# EAGLE board Base_Block-Panel-v10 (EAGLE 6.6.0), part 1 of 4
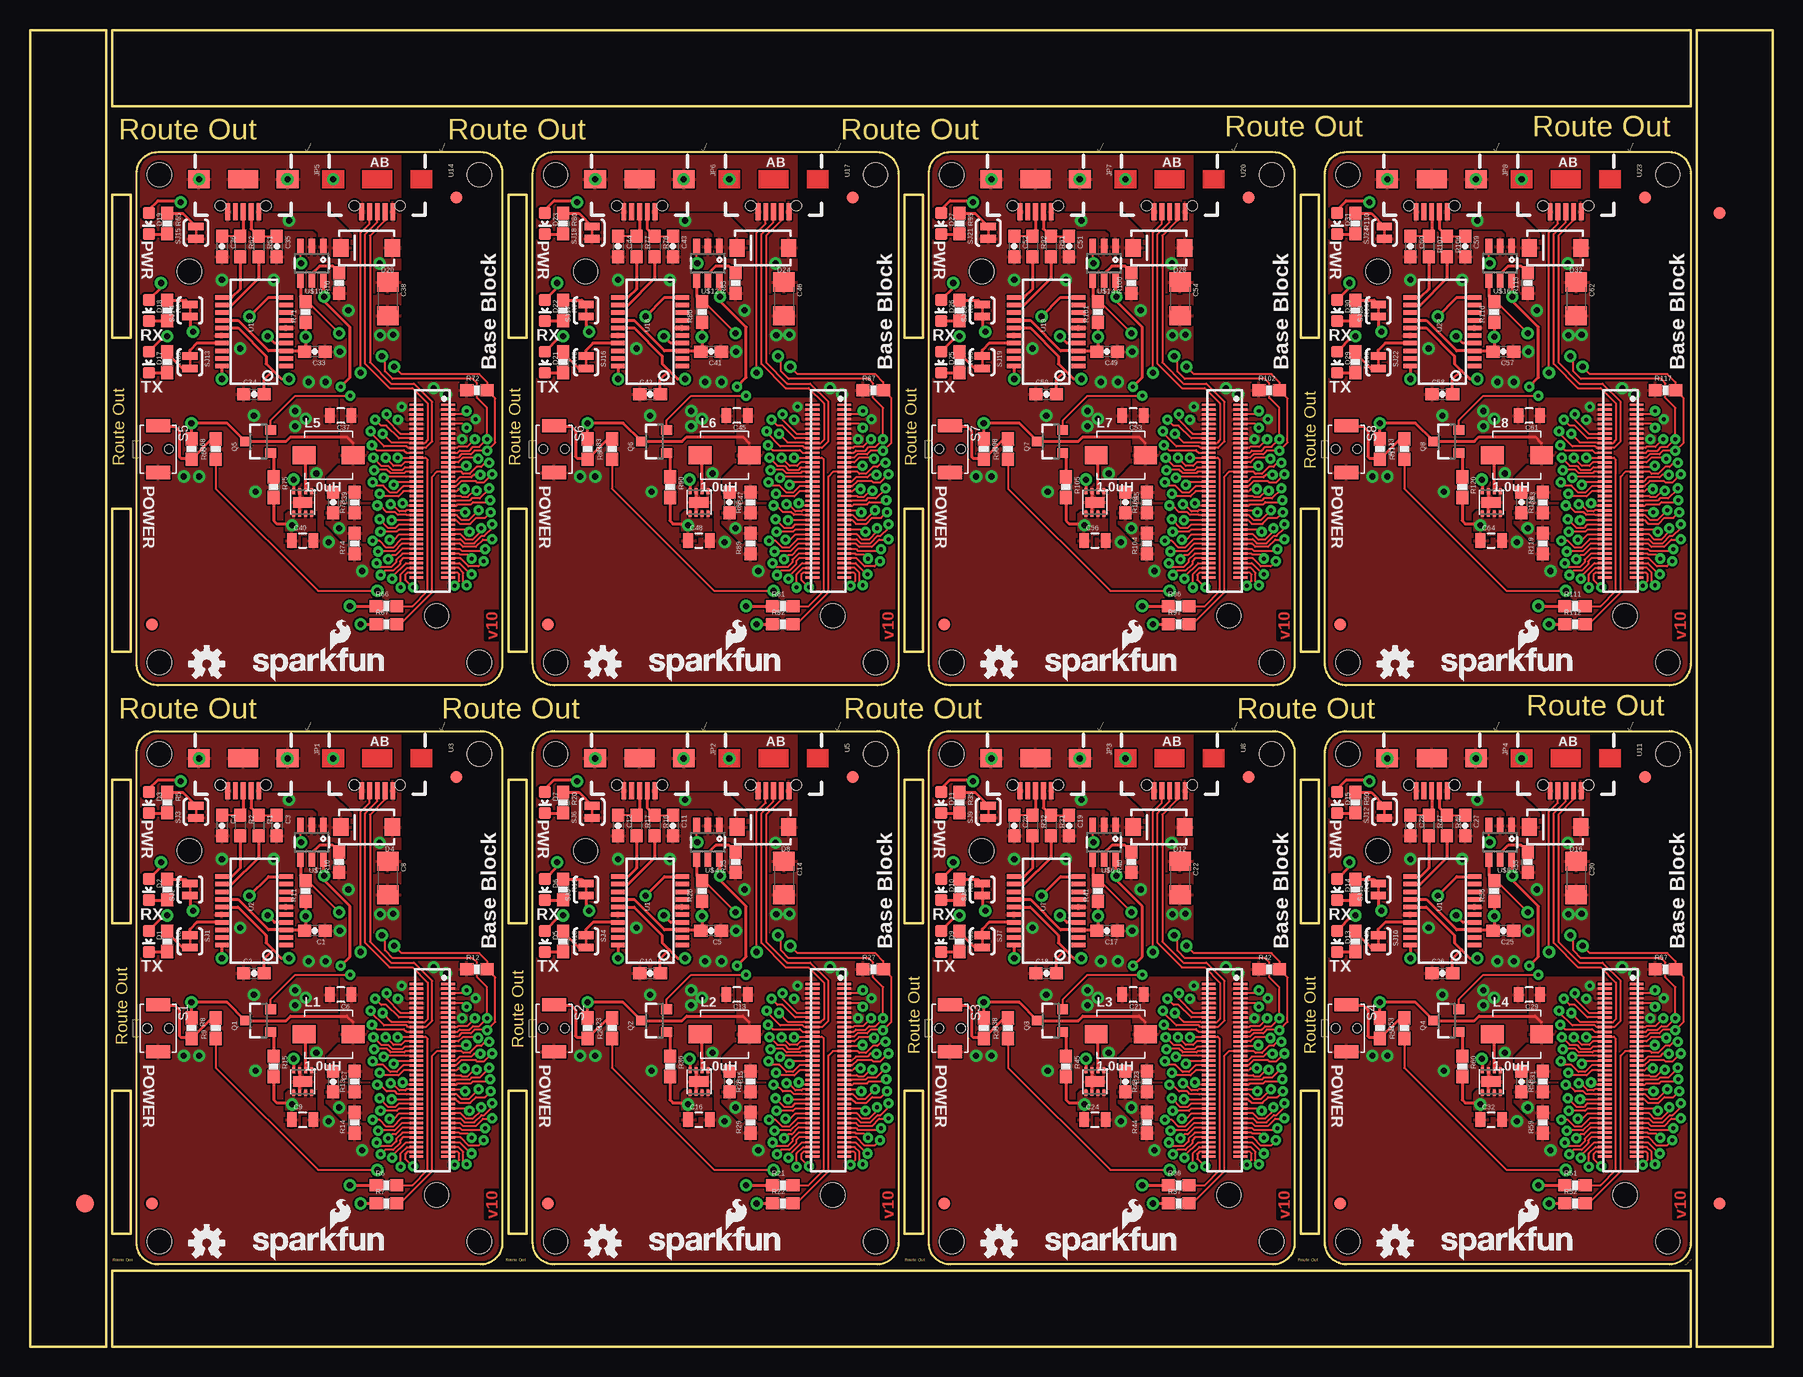
[diagram p0: board, top side]
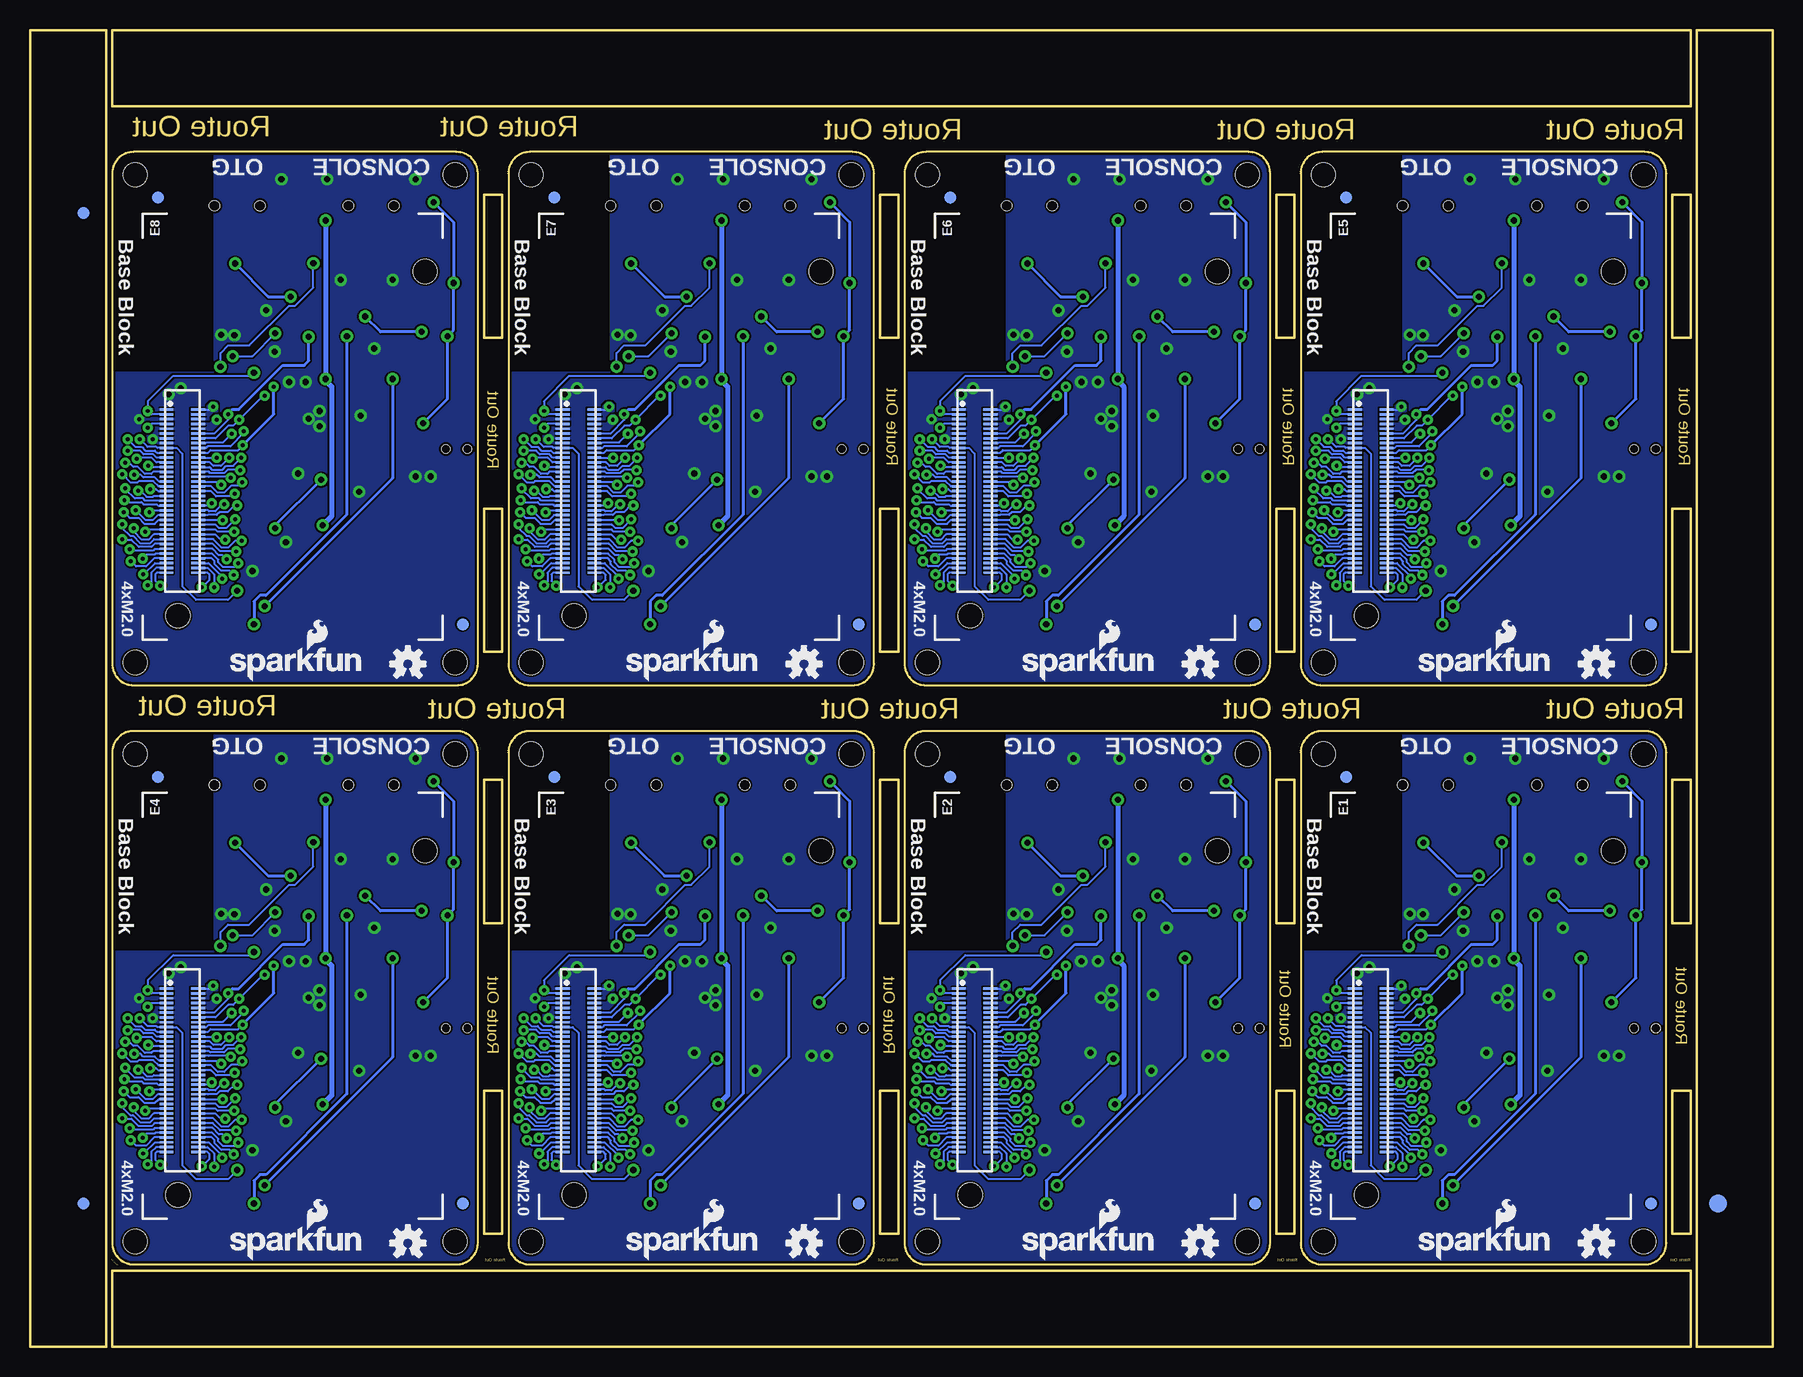
[diagram p1: board, bottom side, seen from below]

Size 145.29 x 109.73 mm. Coordinates in mm from the lower left corner, seen from the top.
Outline: 6.35,79.25 6.35,0 0,0 0,29.72
Outline: 145.29,79.25 145.29,0 138.94,0 138.94,29.72
Outline: 138.94,27.18 138.94,109.73 145.29,109.73 145.29,76.71
Outline: 0,27.18 0,109.73 6.35,109.73 6.35,76.71
Outline: 39.37,49.53 39.37,8.64 arc-90 37.59,6.86 10.67,6.86 arc-90 8.89,8.64 8.89,49.53 arc-90 10.67,51.31 37.59,51.31 arc-90 39.37,49.53
Outline: 72.39,49.53 72.39,8.64 arc-90 70.61,6.86 43.69,6.86 arc-90 41.91,8.64 41.91,49.53 arc-90 43.69,51.31 70.61,51.31 arc-90 72.39,49.53
Outline: 105.41,49.53 105.41,8.64 arc-90 103.63,6.86 76.71,6.86 arc-90 74.93,8.64 74.93,49.53 arc-90 76.71,51.31 103.63,51.31 arc-90 105.41,49.53
Outline: 138.43,49.53 138.43,8.64 arc-90 136.65,6.86 109.73,6.86 arc-90 107.95,8.64 107.95,49.53 arc-90 109.73,51.31 136.65,51.31 arc-90 138.43,49.53
Outline: 39.37,97.79 39.37,56.9 arc-90 37.59,55.12 10.67,55.12 arc-90 8.89,56.9 8.89,97.79 arc-90 10.67,99.57 37.59,99.57 arc-90 39.37,97.79
Outline: 72.39,97.79 72.39,56.9 arc-90 70.61,55.12 43.69,55.12 arc-90 41.91,56.9 41.91,97.79 arc-90 43.69,99.57 70.61,99.57 arc-90 72.39,97.79
Outline: 105.41,97.79 105.41,56.9 arc-90 103.63,55.12 76.71,55.12 arc-90 74.93,56.9 74.93,97.79 arc-90 76.71,99.57 103.63,99.57 arc-90 105.41,97.79
Outline: 138.43,97.79 138.43,56.9 arc-90 136.65,55.12 109.73,55.12 arc-90 107.95,56.9 107.95,97.79 arc-90 109.73,99.57 136.65,99.57 arc-90 138.43,97.79
Outline: 6.86,0 138.43,0 138.43,6.35 6.86,6.35 6.86,0
Outline: 6.86,103.38 138.43,103.38 138.43,109.73 6.86,109.73 6.86,103.38
Outline: 8.38,9.4 8.38,21.34 6.86,21.34 6.86,9.4 8.38,9.4
Outline: 41.4,9.4 41.4,21.34 39.88,21.34 39.88,9.4 41.4,9.4
Outline: 74.42,9.4 74.42,21.34 72.9,21.34 72.9,9.4 74.42,9.4
Outline: 107.44,9.4 107.44,21.34 105.92,21.34 105.92,9.4 107.44,9.4
Outline: 105.92,47.24 105.92,35.31 107.44,35.31 107.44,47.24 105.92,47.24
Outline: 72.9,47.24 72.9,35.31 74.42,35.31 74.42,47.24 72.9,47.24
Outline: 39.88,47.24 39.88,35.31 41.4,35.31 41.4,47.24 39.88,47.24
Outline: 6.86,47.24 6.86,35.31 8.38,35.31 8.38,47.24 6.86,47.24
Outline: 8.38,57.91 8.38,69.85 6.86,69.85 6.86,57.91 8.38,57.91
Outline: 41.4,57.91 41.4,69.85 39.88,69.85 39.88,57.91 41.4,57.91
Outline: 74.42,57.91 74.42,69.85 72.9,69.85 72.9,57.91 74.42,57.91
Outline: 107.44,57.91 107.44,69.85 105.92,69.85 105.92,57.91 107.44,57.91
Outline: 105.92,96.01 105.92,84.07 107.44,84.07 107.44,96.01 105.92,96.01
Outline: 72.9,96.01 72.9,84.07 74.42,84.07 74.42,96.01 72.9,96.01
Outline: 39.88,96.01 39.88,84.07 41.4,84.07 41.4,96.01 39.88,96.01
Outline: 6.86,96.01 6.86,84.07 8.38,84.07 8.38,96.01 6.86,96.01
Copper layers (1*16): Top 0.035mm / dielectric 1.5mm / Bottom 0.035mm
Design rules "SparkFun-2-layer *": minimum track width 6mil, minimum drill 13mil, track to track 6mil, track to pad 6mil, pad to pad 6mil, via to via 6mil, smd to smd 6mil, copper to edge 8mil, drill to drill 8mil, minimum pad ring 12mil, minimum via ring 10mil, stop-mask expansion 4mil, vias tented up to drill 20mil, thermal gap 6mil
Holes 2 mm at 37.47,8.76 10.79,8.76 10.79,49.4 37.47,49.4 70.48,8.76 43.81,8.76 43.81,49.4 70.48,49.4 103.5,8.76 76.83,8.76 76.83,49.4 103.5,49.4 136.53,8.76 109.86,8.76 109.86,49.4 136.53,49.4 37.47,57.02 10.79,57.02 10.79,97.66 37.47,97.66 70.48,57.02 43.81,57.02 43.81,97.66 70.48,97.66 103.5,57.02 76.83,57.02 76.83,97.66 103.5,97.66 136.53,57.02 109.86,57.02 109.86,97.66 136.53,97.66
tRestrict: area 31,33 to 39.4,51.3; area 64,33 to 72.4,51.3; area 97,33 to 105.4,51.3; area 130,33 to 138.4,51.3; area 31,81.3 to 39.4,99.6; area 64,81.3 to 72.4,99.6; area 97,81.3 to 105.4,99.6; area 130,81.3 to 138.4,99.6; 16 lines
bRestrict: area 31,33 to 39.4,51.3; area 64,33 to 72.4,51.3; area 97,33 to 105.4,51.3; area 130,33 to 138.4,51.3; area 31,81.3 to 39.4,99.6; area 64,81.3 to 72.4,99.6; area 97,81.3 to 105.4,99.6; area 130,81.3 to 138.4,99.6

## Footprints (pad centres in the part's own frame; a part is rotated, then mirrored left to right if it is on the bottom)
0603-CAP = smd 1.1 x 1: 1 -0.85,0; 2 0.85,0
0805 = smd 0.8 x 1.2: 1 -0.9,0; 2 0.9,0
1206 = smd 1.6 x 1.8: 1 -1.4,0; 2 1.4,0
LED-0603 = smd 1 x 1: A 0,-0.877; C 0,0.877
SMA-DIODE = smd 1.27 x 1.47: A -2.15,0; C 2.15,0
EDISON_DAUGHTER = smd 1.14 x 0.2: 1 1.98,19.17; 2 4.62,19.17; 3 1.98,18.77; 4 4.62,18.77; 5 1.98,18.37; 6 4.62,18.37; 7 1.98,17.97; 8 4.62,17.97; 9 1.98,17.57; 10 4.62,17.57; 11 1.98,17.17; 12 4.62,17.17; 13 1.98,16.77; 14 4.62,16.77; 15 1.98,16.37; 16 4.62,16.37; 17 1.98,15.97; 18 4.62,15.97; 19 1.98,15.57; 20 4.62,15.57; 21 1.98,15.17; 22 4.62,15.17; 23 1.98,14.77; 24 4.62,14.77; 25 1.98,14.37; 26 4.62,14.37; 27 1.98,13.97; 28 4.62,13.97; 29 1.98,13.57; 30 4.62,13.57; 31 1.98,13.17; 32 4.62,13.17; 33 1.98,12.77; 34 4.62,12.77; 35 1.98,12.37; 36 4.62,12.37; 37 1.98,11.97; 38 4.62,11.97; 39 1.98,11.57; 40 4.62,11.57; 41 1.98,11.17; 42 4.62,11.17; 43 1.98,10.77; 44 4.62,10.77; 45 1.98,10.37; 46 4.62,10.37; 47 1.98,9.97; 48 4.62,9.97; 49 1.98,9.57; 50 4.62,9.57; 51 1.98,9.17; 52 4.62,9.17; 53 1.98,8.77; 54 4.62,8.77; 55 1.98,8.37; 56 4.62,8.37; 57 1.98,7.97; 58 4.62,7.97; 59 1.98,7.57; 60 4.62,7.57; 61 1.98,7.17; 62 4.62,7.17; 63 1.98,6.77; 64 4.62,6.77; 65 1.98,6.37; 66 4.62,6.37; 67 1.98,5.97; 68 4.62,5.97; 69 1.98,5.57; 70 4.62,5.57 | hole 2: 23.53,30.67; 2.93,1.98
FIDUCIAL-1.5X3 = smd 1.5 x 1.5: 1 0,0
FIDUCIAL-1X2 = smd 1 x 1: 1 0,0
USB-B-MICRO-SMD_V03 = smd 1.4 x 0.4: D+1 2.7,0; D-1 2.7,0.65; GND1 2.7,-1.3; ID1 2.7,-0.65; VBUS1 2.7,1.3 | smd 1.5 x 1.8: SHIELD1 0,3.7; SHIELD2 0,-3.7 | smd 1.5 x 2.5: SHIELD3 0,0 | hole 0.85: 2.2,1.9; 2.2,-1.9
INDUCTOR-SRP4020 = smd 1.9 x 1.5: P$1 -2.05,0; P$2 2.05,0
SOT23-3 = smd 0.8 x 0.9: 1 -0.95,-1; 2 0.95,-1; 3 0,1.1
0603 = smd 1.1 x 1: 1 -0.85,0; 2 0.85,0
0603-RES = smd 1.1 x 1: 1 -0.85,0; 2 0.85,0
TACTILE_SWITCH-SMD-RIGHT-ANGLE = smd 1.1 x 2: 1 -1.95,0; 2 1.95,0 | hole 0.7: 0,0.9; 0,-0.9
PAD-JUMPER-2-NC_BY_TRACE_YES_SILK = smd 0.635 x 1.27: 1 -0.508,0; 2 0.508,0
SSOP20_L = smd 0.381 x 1.143: 1 -2.857,-2.68; 2 -2.223,-2.68; 3 -1.587,-2.68; 4 -0.953,-2.68; 5 -0.318,-2.68; 6 0.318,-2.68; 7 0.953,-2.68; 8 1.587,-2.68; 9 2.223,-2.68; 10 2.857,-2.68; 11 2.857,2.68; 12 2.223,2.68; 13 1.587,2.68; 14 0.953,2.68; 15 0.318,2.68; 16 -0.318,2.68; 17 -0.953,2.68; 18 -1.587,2.68; 19 -2.223,2.68; 20 -2.857,2.68
USB-AB-MICRO-SMD_V03 = smd 1.4 x 0.4: D+1 2.7,0; D-1 2.7,0.65; GND1 2.7,-1.3; ID1 2.7,-0.65; VBUS1 2.7,1.3 | hole 0.85: 2.2,1.9; 2.2,-1.9
WSON-8-PAD = smd 0.25 x 0.5: 1 -0.75,-0.95; 2 -0.25,-0.95; 3 0.25,-0.95; 4 0.75,-0.95; 5 0.75,0.95; 6 0.25,0.95; 7 -0.25,0.95; 8 -0.75,0.95 | smd 1.6 x 0.9: PAD 0,0
SOT23-6 = smd 0.55 x 1.35: 1 -0.95,-1.375; 2 0,-1.375; 3 0.95,-1.375; 4 0.95,1.375; 5 0,1.375; 6 -0.95,1.375
DF40C-70DP-0.4(51) = smd 0.2 x 1.14 bottom: 1 6.8,1.32; 2 6.8,-1.32; 3 6.4,1.32; 4 6.4,-1.32; 5 6,1.32; 6 6,-1.32; 7 5.6,1.32; 8 5.6,-1.32; 9 5.2,1.32; 10 5.2,-1.32; 11 4.8,1.32; 12 4.8,-1.32; 13 4.4,1.32; 14 4.4,-1.32; 15 4,1.32; 16 4,-1.32; 17 3.6,1.32; 18 3.6,-1.32; 19 3.2,1.32; 20 3.2,-1.32; 21 2.8,1.32; 22 2.8,-1.32; 23 2.4,1.32; 24 2.4,-1.32; 25 2,1.32; 26 2,-1.32; 27 1.6,1.32; 28 1.6,-1.32; 29 1.2,1.32; 30 1.2,-1.32; 31 0.8,1.32; 32 0.8,-1.32; 33 0.4,1.32; 34 0.4,-1.32; 35 0,1.32; 36 0,-1.32; 37 -0.4,1.32; 38 -0.4,-1.32; 39 -0.8,1.32; 40 -0.8,-1.32; 41 -1.2,1.32; 42 -1.2,-1.32; 43 -1.6,1.32; 44 -1.6,-1.32; 45 -2,1.32; 46 -2,-1.32; 47 -2.4,1.32; 48 -2.4,-1.32; 49 -2.8,1.32; 50 -2.8,-1.32; 51 -3.2,1.32; 52 -3.2,-1.32; 53 -3.6,1.32; 54 -3.6,-1.32; 55 -4,1.32; 56 -4,-1.32; 57 -4.4,1.32; 58 -4.4,-1.32; 59 -4.8,1.32; 60 -4.8,-1.32; 61 -5.2,1.32; 62 -5.2,-1.32; 63 -5.6,1.32; 64 -5.6,-1.32; 65 -6,1.32; 66 -6,-1.32; 67 -6.4,1.32; 68 -6.4,-1.32; 69 -6.8,1.32; 70 -6.8,-1.32; NC1 7.2,1.32; NC2 7.2,-1.32; NC3 -7.2,-1.32; NC4 -7.2,1.32

## Placement (x,y rotation side)
C1  0.1uF  [0603-CAP]  23.75,34.67 180 top
C2  0.1uF  [0603-CAP]  18.67,31.11 0 top
C3  47pF  [0603-CAP]  20.57,43.43 270 top
C4  47pF  [0603-CAP]  16,43.43 270 top
C5  0.1uF  [0603-CAP]  56.77,34.67 180 top
C6  22uF  [0805]  25.91,29.34 180 top
C7  47pF  [0603-CAP]  25.27,22.1 270 top
C8  10uF  [1206]  29.82,39.07 270 top
C9  22uF  [0805]  22.73,18.92 0 top
C10  0.1uF  [0603-CAP]  51.69,31.11 0 top
C11  47pF  [0603-CAP]  53.59,43.43 270 top
C12  47pF  [0603-CAP]  49.02,43.43 270 top
C13  22uF  [0805]  58.93,29.34 180 top
C14  10uF  [1206]  62.84,39.07 270 top
C15  47pF  [0603-CAP]  58.29,22.1 270 top
C16  22uF  [0805]  55.75,18.92 0 top
C17  0.1uF  [0603-CAP]  89.79,34.67 180 top
C18  0.1uF  [0603-CAP]  84.71,31.11 0 top
C19  47pF  [0603-CAP]  86.61,43.43 270 top
C20  47pF  [0603-CAP]  82.04,43.43 270 top
C21  22uF  [0805]  91.95,29.34 180 top
C22  10uF  [1206]  95.86,39.07 270 top
C23  47pF  [0603-CAP]  91.31,22.1 270 top
C24  22uF  [0805]  88.77,18.92 0 top
C25  0.1uF  [0603-CAP]  122.81,34.67 180 top
C26  0.1uF  [0603-CAP]  117.73,31.11 0 top
C27  47pF  [0603-CAP]  119.63,43.43 270 top
C28  47pF  [0603-CAP]  115.06,43.43 270 top
C29  22uF  [0805]  124.97,29.34 180 top
C30  10uF  [1206]  128.88,39.07 270 top
C31  47pF  [0603-CAP]  124.33,22.1 270 top
C32  22uF  [0805]  121.79,18.92 0 top
C33  0.1uF  [0603-CAP]  23.75,82.93 180 top
C34  0.1uF  [0603-CAP]  18.67,79.38 0 top
C35  47pF  [0603-CAP]  20.57,91.69 270 top
C36  47pF  [0603-CAP]  16,91.69 270 top
C37  22uF  [0805]  25.91,77.6 180 top
C38  10uF  [1206]  29.82,87.33 270 top
C39  47pF  [0603-CAP]  25.27,70.36 270 top
C40  22uF  [0805]  22.73,67.18 0 top
C41  0.1uF  [0603-CAP]  56.77,82.93 180 top
C42  0.1uF  [0603-CAP]  51.69,79.38 0 top
C43  47pF  [0603-CAP]  53.59,91.69 270 top
C44  47pF  [0603-CAP]  49.02,91.69 270 top
C45  22uF  [0805]  58.93,77.6 180 top
C46  10uF  [1206]  62.84,87.33 270 top
C47  47pF  [0603-CAP]  58.29,70.36 270 top
C48  22uF  [0805]  55.75,67.18 0 top
C49  0.1uF  [0603-CAP]  89.79,82.93 180 top
C50  0.1uF  [0603-CAP]  84.71,79.38 0 top
C51  47pF  [0603-CAP]  86.61,91.69 270 top
C52  47pF  [0603-CAP]  82.04,91.69 270 top
C53  22uF  [0805]  91.95,77.6 180 top
C54  10uF  [1206]  95.86,87.33 270 top
C55  47pF  [0603-CAP]  91.31,70.36 270 top
C56  22uF  [0805]  88.77,67.18 0 top
C57  0.1uF  [0603-CAP]  122.81,82.93 180 top
C58  0.1uF  [0603-CAP]  117.73,79.38 0 top
C59  47pF  [0603-CAP]  119.63,91.69 270 top
C60  47pF  [0603-CAP]  115.06,91.69 270 top
C61  22uF  [0805]  124.97,77.6 180 top
C62  10uF  [1206]  128.88,87.33 270 top
C63  47pF  [0603-CAP]  124.33,70.36 270 top
C64  22uF  [0805]  121.79,67.18 0 top
D1  RED  [LED-0603]  9.91,33.78 180 top
D2  YELLOW  [LED-0603]  9.91,38.1 180 top
D3  BLUE  [LED-0603]  9.91,45.34 180 top
D4  [SMA-DIODE]  28.07,43.31 180 top
D5  RED  [LED-0603]  42.93,33.78 180 top
D6  YELLOW  [LED-0603]  42.93,38.1 180 top
D7  BLUE  [LED-0603]  42.93,45.34 180 top
D8  [SMA-DIODE]  61.09,43.31 180 top
D9  RED  [LED-0603]  75.95,33.78 180 top
D10  YELLOW  [LED-0603]  75.95,38.1 180 top
D11  BLUE  [LED-0603]  75.95,45.34 180 top
D12  [SMA-DIODE]  94.11,43.31 180 top
D13  RED  [LED-0603]  108.97,33.78 180 top
D14  YELLOW  [LED-0603]  108.97,38.1 180 top
D15  BLUE  [LED-0603]  108.97,45.34 180 top
D16  [SMA-DIODE]  127.13,43.31 180 top
D17  RED  [LED-0603]  9.91,82.04 180 top
D18  YELLOW  [LED-0603]  9.91,86.36 180 top
D19  BLUE  [LED-0603]  9.91,93.6 180 top
D20  [SMA-DIODE]  28.07,91.57 180 top
D21  RED  [LED-0603]  42.93,82.04 180 top
D22  YELLOW  [LED-0603]  42.93,86.36 180 top
D23  BLUE  [LED-0603]  42.93,93.6 180 top
D24  [SMA-DIODE]  61.09,91.57 180 top
D25  RED  [LED-0603]  75.95,82.04 180 top
D26  YELLOW  [LED-0603]  75.95,86.36 180 top
D27  BLUE  [LED-0603]  75.95,93.6 180 top
D28  [SMA-DIODE]  94.11,91.57 180 top
D29  RED  [LED-0603]  108.97,82.04 180 top
D30  YELLOW  [LED-0603]  108.97,86.36 180 top
D31  BLUE  [LED-0603]  108.97,93.6 180 top
D32  [SMA-DIODE]  127.13,91.57 180 top
E1  EDISON_CONNECTOR_FULLMOUNTING_HOLES  [EDISON_DAUGHTER]  36.83,10.67 0 bottom
E2  EDISON_CONNECTOR_FULLMOUNTING_HOLES  [EDISON_DAUGHTER]  69.85,10.67 0 bottom
E3  EDISON_CONNECTOR_FULLMOUNTING_HOLES  [EDISON_DAUGHTER]  102.87,10.67 0 bottom
E4  EDISON_CONNECTOR_FULLMOUNTING_HOLES  [EDISON_DAUGHTER]  135.89,10.67 0 bottom
E5  EDISON_CONNECTOR_FULLMOUNTING_HOLES  [EDISON_DAUGHTER]  36.83,58.93 0 bottom
E6  EDISON_CONNECTOR_FULLMOUNTING_HOLES  [EDISON_DAUGHTER]  69.85,58.93 0 bottom
E7  EDISON_CONNECTOR_FULLMOUNTING_HOLES  [EDISON_DAUGHTER]  102.87,58.93 0 bottom
E8  EDISON_CONNECTOR_FULLMOUNTING_HOLES  [EDISON_DAUGHTER]  135.89,58.93 0 bottom
E$1  [FIDUCIAL-1.5X3]  4.57,11.94 0 top
E$2  [FIDUCIAL-1.5X3]  4.57,11.94 0 bottom
E$3  [FIDUCIAL-1X2]  140.84,94.49 180 bottom
E$4  [FIDUCIAL-1X2]  140.84,11.94 0 top
E$5  [FIDUCIAL-1X2]  140.84,94.49 180 top
E$6  [FIDUCIAL-1X2]  140.84,11.94 0 bottom
FID1  FIDUCIAL1X2  [FIDUCIAL-1X2]  35.56,47.5 0 top
FID2  FIDUCIAL1X2  [FIDUCIAL-1X2]  10.16,11.94 0 top
FID3  FIDUCIAL1X2  [FIDUCIAL-1X2]  10.16,11.94 0 bottom
FID4  FIDUCIAL1X2  [FIDUCIAL-1X2]  35.56,47.5 0 bottom
FID5  FIDUCIAL1X2  [FIDUCIAL-1X2]  68.58,47.5 0 top
FID6  FIDUCIAL1X2  [FIDUCIAL-1X2]  43.18,11.94 0 top
FID7  FIDUCIAL1X2  [FIDUCIAL-1X2]  43.18,11.94 0 bottom
FID8  FIDUCIAL1X2  [FIDUCIAL-1X2]  68.58,47.5 0 bottom
FID9  FIDUCIAL1X2  [FIDUCIAL-1X2]  101.6,47.5 0 top
FID10  FIDUCIAL1X2  [FIDUCIAL-1X2]  76.2,11.94 0 top
FID11  FIDUCIAL1X2  [FIDUCIAL-1X2]  76.2,11.94 0 bottom
FID12  FIDUCIAL1X2  [FIDUCIAL-1X2]  101.6,47.5 0 bottom
FID13  FIDUCIAL1X2  [FIDUCIAL-1X2]  134.62,47.5 0 top
FID14  FIDUCIAL1X2  [FIDUCIAL-1X2]  109.22,11.94 0 top
FID15  FIDUCIAL1X2  [FIDUCIAL-1X2]  109.22,11.94 0 bottom
FID16  FIDUCIAL1X2  [FIDUCIAL-1X2]  134.62,47.5 0 bottom
FID17  FIDUCIAL1X2  [FIDUCIAL-1X2]  35.56,95.76 0 top
FID18  FIDUCIAL1X2  [FIDUCIAL-1X2]  10.16,60.2 0 top
FID19  FIDUCIAL1X2  [FIDUCIAL-1X2]  10.16,60.2 0 bottom
FID20  FIDUCIAL1X2  [FIDUCIAL-1X2]  35.56,95.76 0 bottom
FID21  FIDUCIAL1X2  [FIDUCIAL-1X2]  68.58,95.76 0 top
FID22  FIDUCIAL1X2  [FIDUCIAL-1X2]  43.18,60.2 0 top
FID23  FIDUCIAL1X2  [FIDUCIAL-1X2]  43.18,60.2 0 bottom
FID24  FIDUCIAL1X2  [FIDUCIAL-1X2]  68.58,95.76 0 bottom
FID25  FIDUCIAL1X2  [FIDUCIAL-1X2]  101.6,95.76 0 top
FID26  FIDUCIAL1X2  [FIDUCIAL-1X2]  76.2,60.2 0 top
FID27  FIDUCIAL1X2  [FIDUCIAL-1X2]  76.2,60.2 0 bottom
FID28  FIDUCIAL1X2  [FIDUCIAL-1X2]  101.6,95.76 0 bottom
FID29  FIDUCIAL1X2  [FIDUCIAL-1X2]  134.62,95.76 0 top
FID30  FIDUCIAL1X2  [FIDUCIAL-1X2]  109.22,60.2 0 top
FID31  FIDUCIAL1X2  [FIDUCIAL-1X2]  109.22,60.2 0 bottom
FID32  FIDUCIAL1X2  [FIDUCIAL-1X2]  134.62,95.76 0 bottom
JP1  USB_MICROB  [USB-B-MICRO-SMD_V03]  17.78,49.02 270 top
JP2  USB_MICROB  [USB-B-MICRO-SMD_V03]  50.8,49.02 270 top
JP3  USB_MICROB  [USB-B-MICRO-SMD_V03]  83.82,49.02 270 top
JP4  USB_MICROB  [USB-B-MICRO-SMD_V03]  116.84,49.02 270 top
JP5  USB_MICROB  [USB-B-MICRO-SMD_V03]  17.78,97.28 270 top
JP6  USB_MICROB  [USB-B-MICRO-SMD_V03]  50.8,97.28 270 top
JP7  USB_MICROB  [USB-B-MICRO-SMD_V03]  83.82,97.28 270 top
JP8  USB_MICROB  [USB-B-MICRO-SMD_V03]  116.84,97.28 270 top
L1  1.0uH  [INDUCTOR-SRP4020]  24.89,26.04 0 top
L2  1.0uH  [INDUCTOR-SRP4020]  57.91,26.04 0 top
L3  1.0uH  [INDUCTOR-SRP4020]  90.93,26.04 0 top
L4  1.0uH  [INDUCTOR-SRP4020]  123.95,26.04 0 top
L5  1.0uH  [INDUCTOR-SRP4020]  24.89,74.3 0 top
L6  1.0uH  [INDUCTOR-SRP4020]  57.91,74.3 0 top
L7  1.0uH  [INDUCTOR-SRP4020]  90.93,74.3 0 top
L8  1.0uH  [INDUCTOR-SRP4020]  123.95,74.3 0 top
LOGO1  SFE_LOGO_NAME_FLAME.1_INCH  [SFE_LOGO_NAME_FLAME_.1]  18.16,7.11 0 top
LOGO2  OSHW-LOGOS  [OSHW-LOGO-S]  14.73,8.64 0 bottom
LOGO3  SFE_LOGO_NAME_FLAME.1_INCH  [SFE_LOGO_NAME_FLAME_.1]  29.97,7.11 0 bottom
LOGO4  OSHW-LOGOS  [OSHW-LOGO-S]  14.73,8.64 0 top
LOGO5  OSHW-LOGOS  [OSHW-LOGO-S]  47.75,8.64 0 bottom
LOGO6  SFE_LOGO_NAME_FLAME.1_INCH  [SFE_LOGO_NAME_FLAME_.1]  62.99,7.11 0 bottom
LOGO7  SFE_LOGO_NAME_FLAME.1_INCH  [SFE_LOGO_NAME_FLAME_.1]  51.18,7.11 0 top
LOGO8  OSHW-LOGOS  [OSHW-LOGO-S]  47.75,8.64 0 top
LOGO9  OSHW-LOGOS  [OSHW-LOGO-S]  80.77,8.64 0 bottom
LOGO10  SFE_LOGO_NAME_FLAME.1_INCH  [SFE_LOGO_NAME_FLAME_.1]  96.01,7.11 0 bottom
LOGO11  SFE_LOGO_NAME_FLAME.1_INCH  [SFE_LOGO_NAME_FLAME_.1]  84.2,7.11 0 top
LOGO12  OSHW-LOGOS  [OSHW-LOGO-S]  80.77,8.64 0 top
LOGO13  OSHW-LOGOS  [OSHW-LOGO-S]  113.79,8.64 0 bottom
LOGO14  SFE_LOGO_NAME_FLAME.1_INCH  [SFE_LOGO_NAME_FLAME_.1]  129.03,7.11 0 bottom
LOGO15  SFE_LOGO_NAME_FLAME.1_INCH  [SFE_LOGO_NAME_FLAME_.1]  117.22,7.11 0 top
LOGO16  OSHW-LOGOS  [OSHW-LOGO-S]  113.79,8.64 0 top
LOGO17  OSHW-LOGOS  [OSHW-LOGO-S]  14.73,56.9 0 bottom
LOGO18  SFE_LOGO_NAME_FLAME.1_INCH  [SFE_LOGO_NAME_FLAME_.1]  29.97,55.37 0 bottom
LOGO19  SFE_LOGO_NAME_FLAME.1_INCH  [SFE_LOGO_NAME_FLAME_.1]  18.16,55.37 0 top
LOGO20  OSHW-LOGOS  [OSHW-LOGO-S]  14.73,56.9 0 top
LOGO21  OSHW-LOGOS  [OSHW-LOGO-S]  47.75,56.9 0 bottom
LOGO22  SFE_LOGO_NAME_FLAME.1_INCH  [SFE_LOGO_NAME_FLAME_.1]  62.99,55.37 0 bottom
LOGO23  SFE_LOGO_NAME_FLAME.1_INCH  [SFE_LOGO_NAME_FLAME_.1]  51.18,55.37 0 top
LOGO24  OSHW-LOGOS  [OSHW-LOGO-S]  47.75,56.9 0 top
LOGO25  OSHW-LOGOS  [OSHW-LOGO-S]  80.77,56.9 0 bottom
LOGO26  SFE_LOGO_NAME_FLAME.1_INCH  [SFE_LOGO_NAME_FLAME_.1]  96.01,55.37 0 bottom
LOGO27  SFE_LOGO_NAME_FLAME.1_INCH  [SFE_LOGO_NAME_FLAME_.1]  84.2,55.37 0 top
LOGO28  OSHW-LOGOS  [OSHW-LOGO-S]  80.77,56.9 0 top
LOGO29  OSHW-LOGOS  [OSHW-LOGO-S]  113.79,56.9 0 bottom
LOGO30  SFE_LOGO_NAME_FLAME.1_INCH  [SFE_LOGO_NAME_FLAME_.1]  129.03,55.37 0 bottom
LOGO31  SFE_LOGO_NAME_FLAME.1_INCH  [SFE_LOGO_NAME_FLAME_.1]  117.22,55.37 0 top
LOGO32  OSHW-LOGOS  [OSHW-LOGO-S]  113.79,56.9 0 top
Q1  BSS138  [SOT23-3]  19.05,27.18 90 top
Q2  BSS138  [SOT23-3]  52.07,27.18 90 top
Q3  BSS138  [SOT23-3]  85.09,27.18 90 top
Q4  BSS138  [SOT23-3]  118.11,27.18 90 top
Q5  BSS138  [SOT23-3]  19.05,75.44 90 top
Q6  BSS138  [SOT23-3]  52.07,75.44 90 top
Q7  BSS138  [SOT23-3]  85.09,75.44 90 top
Q8  BSS138  [SOT23-3]  118.11,75.44 90 top
R1  27  [0603]  19.05,43.43 270 top
R2  27  [0603]  17.53,43.43 270 top
R3  1K  [0603-RES]  11.43,33.78 270 top
R4  1K  [0603-RES]  11.43,38.1 270 top
R5  1K  [0603-RES]  11.43,45.34 270 top
R6  100  [0603-RES]  29.72,13.46 0 top
R7  100  [0603-RES]  29.72,11.94 0 top
R8  10K  [0603-RES]  13.46,26.54 270 top
R9  220  [0603-RES]  15.49,26.54 90 top
R10  287  [0603-RES]  25.78,40.39 90 top
R11  10K  [0603-RES]  22.99,37.97 90 top
R12  100k  [0603-RES]  37.26,31.45 0 top
R13  680k  [0603-RES]  27.05,22.1 90 top
R14  120k  [0603-RES]  27.05,18.67 90 top
R15  1K  [0603-RES]  20.32,23.37 270 top
R16  27  [0603]  52.07,43.43 270 top
R17  27  [0603]  50.55,43.43 270 top
R18  1K  [0603-RES]  44.45,33.78 270 top
R19  1K  [0603-RES]  44.45,38.1 270 top
R20  1K  [0603-RES]  44.45,45.34 270 top
R21  100  [0603-RES]  62.74,13.46 0 top
R22  100  [0603-RES]  62.74,11.94 0 top
R23  10K  [0603-RES]  46.48,26.54 270 top
R24  220  [0603-RES]  48.51,26.54 90 top
R25  287  [0603-RES]  58.8,40.39 90 top
R26  10K  [0603-RES]  56.01,37.97 90 top
R27  100k  [0603-RES]  70.28,31.45 0 top
R28  680k  [0603-RES]  60.07,22.1 90 top
R29  120k  [0603-RES]  60.07,18.67 90 top
R30  1K  [0603-RES]  53.34,23.37 270 top
R31  27  [0603]  85.09,43.43 270 top
R32  27  [0603]  83.57,43.43 270 top
R33  1K  [0603-RES]  77.47,33.78 270 top
R34  1K  [0603-RES]  77.47,38.1 270 top
R35  1K  [0603-RES]  77.47,45.34 270 top
R36  100  [0603-RES]  95.76,13.46 0 top
R37  100  [0603-RES]  95.76,11.94 0 top
R38  10K  [0603-RES]  79.5,26.54 270 top
R39  220  [0603-RES]  81.53,26.54 90 top
R40  287  [0603-RES]  91.82,40.39 90 top
R41  10K  [0603-RES]  89.03,37.97 90 top
R42  100k  [0603-RES]  103.3,31.45 0 top
R43  680k  [0603-RES]  93.09,22.1 90 top
R44  120k  [0603-RES]  93.09,18.67 90 top
R45  1K  [0603-RES]  86.36,23.37 270 top
R46  27  [0603]  118.11,43.43 270 top
R47  27  [0603]  116.59,43.43 270 top
R48  1K  [0603-RES]  110.49,33.78 270 top
R49  1K  [0603-RES]  110.49,38.1 270 top
R50  1K  [0603-RES]  110.49,45.34 270 top
R51  100  [0603-RES]  128.78,13.46 0 top
R52  100  [0603-RES]  128.78,11.94 0 top
R53  10K  [0603-RES]  112.52,26.54 270 top
R54  220  [0603-RES]  114.55,26.54 90 top
R55  287  [0603-RES]  124.84,40.39 90 top
R56  10K  [0603-RES]  122.05,37.97 90 top
R57  100k  [0603-RES]  136.32,31.45 0 top
R58  680k  [0603-RES]  126.11,22.1 90 top
R59  120k  [0603-RES]  126.11,18.67 90 top
R60  1K  [0603-RES]  119.38,23.37 270 top
R61  27  [0603]  19.05,91.69 270 top
R62  27  [0603]  17.53,91.69 270 top
R63  1K  [0603-RES]  11.43,82.04 270 top
R64  1K  [0603-RES]  11.43,86.36 270 top
R65  1K  [0603-RES]  11.43,93.6 270 top
R66  100  [0603-RES]  29.72,61.72 0 top
R67  100  [0603-RES]  29.72,60.2 0 top
R68  10K  [0603-RES]  13.46,74.8 270 top
R69  220  [0603-RES]  15.49,74.8 90 top
R70  287  [0603-RES]  25.78,88.65 90 top
R71  10K  [0603-RES]  22.99,86.23 90 top
R72  100k  [0603-RES]  37.26,79.71 0 top
R73  680k  [0603-RES]  27.05,70.36 90 top
R74  120k  [0603-RES]  27.05,66.93 90 top
R75  1K  [0603-RES]  20.32,71.63 270 top
R76  27  [0603]  52.07,91.69 270 top
R77  27  [0603]  50.55,91.69 270 top
R78  1K  [0603-RES]  44.45,82.04 270 top
R79  1K  [0603-RES]  44.45,86.36 270 top
R80  1K  [0603-RES]  44.45,93.6 270 top
R81  100  [0603-RES]  62.74,61.72 0 top
R82  100  [0603-RES]  62.74,60.2 0 top
R83  10K  [0603-RES]  46.48,74.8 270 top
R84  220  [0603-RES]  48.51,74.8 90 top
R85  287  [0603-RES]  58.8,88.65 90 top
R86  10K  [0603-RES]  56.01,86.23 90 top
R87  100k  [0603-RES]  70.28,79.71 0 top
R88  680k  [0603-RES]  60.07,70.36 90 top
R89  120k  [0603-RES]  60.07,66.93 90 top
R90  1K  [0603-RES]  53.34,71.63 270 top
R91  27  [0603]  85.09,91.69 270 top
R92  27  [0603]  83.57,91.69 270 top
R93  1K  [0603-RES]  77.47,82.04 270 top
R94  1K  [0603-RES]  77.47,86.36 270 top
R95  1K  [0603-RES]  77.47,93.6 270 top
R96  100  [0603-RES]  95.76,61.72 0 top
R97  100  [0603-RES]  95.76,60.2 0 top
R98  10K  [0603-RES]  79.5,74.8 270 top
R99  220  [0603-RES]  81.53,74.8 90 top
R100  287  [0603-RES]  91.82,88.65 90 top
R101  10K  [0603-RES]  89.03,86.23 90 top
R102  100k  [0603-RES]  103.3,79.71 0 top
R103  680k  [0603-RES]  93.09,70.36 90 top
R104  120k  [0603-RES]  93.09,66.93 90 top
R105  1K  [0603-RES]  86.36,71.63 270 top
R106  27  [0603]  118.11,91.69 270 top
R107  27  [0603]  116.59,91.69 270 top
R108  1K  [0603-RES]  110.49,82.04 270 top
R109  1K  [0603-RES]  110.49,86.36 270 top
R110  1K  [0603-RES]  110.49,93.6 270 top
R111  100  [0603-RES]  128.78,61.72 0 top
R112  100  [0603-RES]  128.78,60.2 0 top
R113  10K  [0603-RES]  112.52,74.8 270 top
R114  220  [0603-RES]  114.55,74.8 90 top
R115  287  [0603-RES]  124.84,88.65 90 top
R116  10K  [0603-RES]  122.05,86.23 90 top
R117  100k  [0603-RES]  136.32,79.71 0 top
R118  680k  [0603-RES]  126.11,70.36 90 top
R119  120k  [0603-RES]  126.11,66.93 90 top
R120  1K  [0603-RES]  119.38,71.63 270 top
S1  POWER  [TACTILE_SWITCH-SMD-RIGHT-ANGLE]  10.67,26.54 270 top
S2  POWER  [TACTILE_SWITCH-SMD-RIGHT-ANGLE]  43.69,26.54 270 top
S3  POWER  [TACTILE_SWITCH-SMD-RIGHT-ANGLE]  76.71,26.54 270 top
S4  POWER  [TACTILE_SWITCH-SMD-RIGHT-ANGLE]  109.73,26.54 270 top
S5  POWER  [TACTILE_SWITCH-SMD-RIGHT-ANGLE]  10.67,74.8 270 top
S6  POWER  [TACTILE_SWITCH-SMD-RIGHT-ANGLE]  43.69,74.8 270 top
S7  POWER  [TACTILE_SWITCH-SMD-RIGHT-ANGLE]  76.71,74.8 270 top
S8  POWER  [TACTILE_SWITCH-SMD-RIGHT-ANGLE]  109.73,74.8 270 top
SJ1  JUMPER-PAD-2-NC_BY_TRACE  [PAD-JUMPER-2-NC_BY_TRACE_YES_SILK]  13.34,33.78 270 top
SJ2  JUMPER-PAD-2-NC_BY_TRACE  [PAD-JUMPER-2-NC_BY_TRACE_YES_SILK]  13.34,38.1 90 top
SJ3  JUMPER-PAD-2-NC_BY_TRACE  [PAD-JUMPER-2-NC_BY_TRACE_YES_SILK]  13.84,44.58 90 top
SJ4  JUMPER-PAD-2-NC_BY_TRACE  [PAD-JUMPER-2-NC_BY_TRACE_YES_SILK]  46.35,33.78 270 top
SJ5  JUMPER-PAD-2-NC_BY_TRACE  [PAD-JUMPER-2-NC_BY_TRACE_YES_SILK]  46.35,38.1 90 top
SJ6  JUMPER-PAD-2-NC_BY_TRACE  [PAD-JUMPER-2-NC_BY_TRACE_YES_SILK]  46.86,44.58 90 top
SJ7  JUMPER-PAD-2-NC_BY_TRACE  [PAD-JUMPER-2-NC_BY_TRACE_YES_SILK]  79.38,33.78 270 top
SJ8  JUMPER-PAD-2-NC_BY_TRACE  [PAD-JUMPER-2-NC_BY_TRACE_YES_SILK]  79.38,38.1 90 top
SJ9  JUMPER-PAD-2-NC_BY_TRACE  [PAD-JUMPER-2-NC_BY_TRACE_YES_SILK]  79.88,44.58 90 top
SJ10  JUMPER-PAD-2-NC_BY_TRACE  [PAD-JUMPER-2-NC_BY_TRACE_YES_SILK]  112.39,33.78 270 top
SJ11  JUMPER-PAD-2-NC_BY_TRACE  [PAD-JUMPER-2-NC_BY_TRACE_YES_SILK]  112.39,38.1 90 top
SJ12  JUMPER-PAD-2-NC_BY_TRACE  [PAD-JUMPER-2-NC_BY_TRACE_YES_SILK]  112.9,44.58 90 top
SJ13  JUMPER-PAD-2-NC_BY_TRACE  [PAD-JUMPER-2-NC_BY_TRACE_YES_SILK]  13.34,82.04 270 top
SJ14  JUMPER-PAD-2-NC_BY_TRACE  [PAD-JUMPER-2-NC_BY_TRACE_YES_SILK]  13.34,86.36 90 top
SJ15  JUMPER-PAD-2-NC_BY_TRACE  [PAD-JUMPER-2-NC_BY_TRACE_YES_SILK]  13.84,92.84 90 top
SJ16  JUMPER-PAD-2-NC_BY_TRACE  [PAD-JUMPER-2-NC_BY_TRACE_YES_SILK]  46.35,82.04 270 top
SJ17  JUMPER-PAD-2-NC_BY_TRACE  [PAD-JUMPER-2-NC_BY_TRACE_YES_SILK]  46.35,86.36 90 top
SJ18  JUMPER-PAD-2-NC_BY_TRACE  [PAD-JUMPER-2-NC_BY_TRACE_YES_SILK]  46.86,92.84 90 top
SJ19  JUMPER-PAD-2-NC_BY_TRACE  [PAD-JUMPER-2-NC_BY_TRACE_YES_SILK]  79.38,82.04 270 top
SJ20  JUMPER-PAD-2-NC_BY_TRACE  [PAD-JUMPER-2-NC_BY_TRACE_YES_SILK]  79.38,86.36 90 top
SJ21  JUMPER-PAD-2-NC_BY_TRACE  [PAD-JUMPER-2-NC_BY_TRACE_YES_SILK]  79.88,92.84 90 top
SJ22  JUMPER-PAD-2-NC_BY_TRACE  [PAD-JUMPER-2-NC_BY_TRACE_YES_SILK]  112.39,82.04 270 top
SJ23  JUMPER-PAD-2-NC_BY_TRACE  [PAD-JUMPER-2-NC_BY_TRACE_YES_SILK]  112.39,86.36 90 top
SJ24  JUMPER-PAD-2-NC_BY_TRACE  [PAD-JUMPER-2-NC_BY_TRACE_YES_SILK]  112.9,92.84 90 top
U1  FTS31XS-U  [SSOP20_L]  51.69,36.32 90 top
U2  FTS31XS-U  [SSOP20_L]  18.67,36.32 90 top
U3  [USB-AB-MICRO-SMD_V03]  28.96,49.02 270 top
U4  TPS62065  [WSON-8-PAD]  22.73,22.1 180 top
U5  [USB-AB-MICRO-SMD_V03]  61.98,49.02 270 top
U6  TPS62065  [WSON-8-PAD]  55.75,22.1 180 top
U7  FTS31XS-U  [SSOP20_L]  84.71,36.32 90 top
U8  [USB-AB-MICRO-SMD_V03]  95,49.02 270 top
U9  TPS62065  [WSON-8-PAD]  88.77,22.1 180 top
U10  FTS31XS-U  [SSOP20_L]  117.73,36.32 90 top
U11  [USB-AB-MICRO-SMD_V03]  128.02,49.02 270 top
U12  TPS62065  [WSON-8-PAD]  121.79,22.1 180 top
U13  FTS31XS-U  [SSOP20_L]  18.67,84.58 90 top
U14  [USB-AB-MICRO-SMD_V03]  28.96,97.28 270 top
U15  TPS62065  [WSON-8-PAD]  22.73,70.36 180 top
U16  FTS31XS-U  [SSOP20_L]  51.69,84.58 90 top
U17  [USB-AB-MICRO-SMD_V03]  61.98,97.28 270 top
U18  TPS62065  [WSON-8-PAD]  55.75,70.36 180 top
U19  FTS31XS-U  [SSOP20_L]  84.71,84.58 90 top
U20  [USB-AB-MICRO-SMD_V03]  95,97.28 270 top
U21  TPS62065  [WSON-8-PAD]  88.77,70.36 180 top
U22  FTS31XS-U  [SSOP20_L]  117.73,84.58 90 top
U23  [USB-AB-MICRO-SMD_V03]  128.02,97.28 270 top
U24  TPS62065  [WSON-8-PAD]  121.79,70.36 180 top
U$1  MIC2039  [SOT23-6]  23.5,42.04 180 top
U$2  EDISON_CONNECTOR_FULLHEADER  [DF40C-70DP-0.4(51)]  66.55,23.04 90 bottom
U$3  EDISON_CONNECTOR_FULLHEADER  [DF40C-70DP-0.4(51)]  33.53,23.04 90 bottom
U$4  MIC2039  [SOT23-6]  56.52,42.04 180 top
U$5  EDISON_CONNECTOR_FULLHEADER  [DF40C-70DP-0.4(51)]  99.57,23.04 90 bottom
U$6  MIC2039  [SOT23-6]  89.53,42.04 180 top
U$7  EDISON_CONNECTOR_FULLHEADER  [DF40C-70DP-0.4(51)]  132.59,23.04 90 bottom
U$8  MIC2039  [SOT23-6]  122.56,42.04 180 top
U$9  EDISON_CONNECTOR_FULLHEADER  [DF40C-70DP-0.4(51)]  33.53,71.3 90 bottom
U$10  MIC2039  [SOT23-6]  23.5,90.3 180 top
U$11  EDISON_CONNECTOR_FULLHEADER  [DF40C-70DP-0.4(51)]  66.55,71.3 90 bottom
U$12  MIC2039  [SOT23-6]  56.52,90.3 180 top
U$13  EDISON_CONNECTOR_FULLHEADER  [DF40C-70DP-0.4(51)]  99.57,71.3 90 bottom
U$14  MIC2039  [SOT23-6]  89.53,90.3 180 top
U$15  EDISON_CONNECTOR_FULLHEADER  [DF40C-70DP-0.4(51)]  132.59,71.3 90 bottom
U$16  MIC2039  [SOT23-6]  122.56,90.3 180 top

## Library data of the parts
C1 C2 C5 C10 C17 C18 C25 C26 C33 C34 C41 C42 C49 C50 C57 C58 = SparkFun-Capacitors; PROD_ID: CAP-00810
C3 C4 C7 C11 C12 C15 C19 C20 C23 C27 C28 C31 C35 C36 C39 C43 C44 C47 C51 C52 C55 C59 C60 C63 = SparkFun-Capacitors; PROD_ID: CAP-08913
C6 C9 C13 C16 C21 C24 C29 C32 C37 C40 C45 C48 C53 C56 C61 C64 = SparkFun-Capacitors; PROD_ID: CAP-08402
C8 C14 C22 C30 C38 C46 C54 C62 = SparkFun-Capacitors; PROD_ID: CAP-10057
D1 D5 D9 D13 D17 D21 D25 D29 = SparkFun-LED; PROD_ID: DIO-00819
D2 D6 D10 D14 D18 D22 D26 D30 = SparkFun-LED; PROD_ID: DIO-09003
D3 D7 D11 D15 D19 D23 D27 D31 = SparkFun-LED; PROD_ID: DIO-08575
D4 D8 D12 D16 D20 D24 D28 D32 = SparkFun-DiscreteSemi; PROD_ID: DIO-08053
E1-E8 U$2 U$3 U$5 U$7 U$9 U$11 U$13 U$15 = Edison
E$1 E$2 = SparkFun-Retired
E$3-E$6 FID1-FID32 LOGO1-LOGO32 = SparkFun-Aesthetics
JP1-JP8 = SparkFun-Connectors; PROD_ID: CONN-11752
L1-L8 SJ1-SJ24 = SparkFun-Passives
Q1-Q8 = SparkFun-DiscreteSemi; PROD_ID: TRANS-00830
R1 R2 R16 R17 R31 R32 R46 R47 R61 R62 R76 R77 R91 R92 R106 R107 = SparkFun-Resistors; PROD_ID: RES-09334
R3-R5 R15 R18-R20 R30 R33-R35 R45 R48-R50 R60 R63-R65 R75 R78-R80 R90 R93-R95 R105 R108-R110 R120 = SparkFun-Resistors; PROD_ID: RES-07856
R6 R7 R21 R22 R36 R37 R51 R52 R66 R67 R81 R82 R96 R97 R111 R112 = SparkFun-Resistors; PROD_ID: RES-07863
R8 R11 R23 R26 R38 R41 R53 R56 R68 R71 R83 R86 R98 R101 R113 R116 = SparkFun-Resistors; PROD_ID: RES-00824
R9 R24 R39 R54 R69 R84 R99 R114 = SparkFun-Resistors; PROD_ID: RES-08698
R10 R25 R40 R55 R70 R85 R100 R115 = SparkFun-Resistors; PROD_ID: RES-10752
R12 R27 R42 R57 R72 R87 R102 R117 = SparkFun-Resistors; PROD_ID: RES-07828
R13 R14 R28 R29 R43 R44 R58 R59 R73 R74 R88 R89 R103 R104 R118 R119 = SparkFun-Resistors
S1-S8 = SparkFun-Electromechanical; PROD_ID: COMP-12265
U1 U2 U7 U10 U13 U16 U19 U22 = SparkFun-DigitalIC; PROD_ID: IC-11524
U3 U5 U8 U11 U14 U17 U20 U23 = SparkFun-Connectors; PROD_ID: CONN-11794
U4 U6 U9 U12 U15 U18 U21 U24 U$1 U$4 U$6 U$8 U$10 U$12 U$14 U$16 = Testing

## Nets
1.8V: C1.2 E1.12 R11.1 U2.3 U2.14 U$3.12
1.8V1: C5.2 E2.12 R26.1 U1.3 U1.14 U$2.12
1.8V2: C17.2 E3.12 R41.1 U7.3 U7.14 U$5.12
1.8V3: C25.2 E4.12 R56.1 U10.3 U10.14 U$7.12
1.8V4: C33.2 E5.12 R71.1 U13.3 U13.14 U$9.12
1.8V5: C41.2 E6.12 R86.1 U16.3 U16.14 U$11.12
1.8V6: C49.2 E7.12 R101.1 U19.3 U19.14 U$13.12
1.8V7: C57.2 E8.12 R116.1 U22.3 U22.14 U$15.12
3.3V: E1.8 E1.10 U$3.8 U$3.10
3.3V1: E2.8 E2.10 U$2.8 U$2.10
3.3V2: E3.8 E3.10 U$5.8 U$5.10
3.3V3: E4.8 E4.10 U$7.8 U$7.10
3.3V4: E5.8 E5.10 U$9.8 U$9.10
3.3V5: E6.8 E6.10 U$11.8 U$11.10
3.3V6: E7.8 E7.10 U$13.8 U$13.10
3.3V7: E8.8 E8.10 U$15.8 U$15.10
5V: C2.2 C9.1 D4.C JP1.VBUS1 R15.2 U2.15 U4.5 U4.7 U4.8 U$1.1
5V1: C10.2 C16.1 D8.C JP2.VBUS1 R30.2 U1.15 U6.5 U6.7 U6.8 U$4.1
5V2: C18.2 C24.1 D12.C JP3.VBUS1 R45.2 U7.15 U9.5 U9.7 U9.8 U$6.1
5V3: C26.2 C32.1 D16.C JP4.VBUS1 R60.2 U10.15 U12.5 U12.7 U12.8 U$8.1
5V4: C34.2 C40.1 D20.C JP5.VBUS1 R75.2 U13.15 U15.5 U15.7 U15.8 U$10.1
5V5: C42.2 C48.1 D24.C JP6.VBUS1 R90.2 U16.15 U18.5 U18.7 U18.8 U$12.1
5V6: C50.2 C56.1 D28.C JP7.VBUS1 R105.2 U19.15 U21.5 U21.7 U21.8 U$14.1
5V7: C58.2 C64.1 D32.C JP8.VBUS1 R120.2 U22.15 U24.5 U24.7 U24.8 U$16.1
DCIN: E1.14 Q1.2 U$3.14
DCIN1: E2.14 Q2.2 U$2.14
DCIN2: E3.14 Q3.2 U$5.14
DCIN3: E4.14 Q4.2 U$7.14
DCIN4: E5.14 Q5.2 U$9.14
DCIN5: E6.14 Q6.2 U$11.14
DCIN6: E7.14 Q7.2 U$13.14
DCIN7: E8.14 Q8.2 U$15.14
FAULT: E1.19 R11.2 U$1.4 U$3.19
FAULT1: E2.19 R26.2 U$2.19 U$4.4
FAULT2: E3.19 R41.2 U$5.19 U$6.4
FAULT3: E4.19 R56.2 U$7.19 U$8.4
FAULT4: E5.19 R71.2 U$9.19 U$10.4
FAULT5: E6.19 R86.2 U$11.19 U$12.4
FAULT6: E7.19 R101.2 U$13.19 U$14.4
FAULT7: E8.19 R116.2 U$15.19 U$16.4
FW_RCVR: E1.69 U$3.69
FW_RCVR1: E2.69 U$2.69
FW_RCVR2: E3.69 U$5.69
FW_RCVR3: E4.69 U$7.69
FW_RCVR4: E5.69 U$9.69
FW_RCVR5: E6.69 U$11.69
FW_RCVR6: E7.69 U$13.69
FW_RCVR7: E8.69 U$15.69
GND: C1.1 C2.1 C3.2 C4.2 C6.2 C8.2 C9.2 E1.1 E1.5 E1.9 E1.11 E1.13 E1.15 JP1.GND1 JP1.SHIELD1 JP1.SHIELD2 JP1.SHIELD3 R10.1 R12.1 R14.1 S1.2 SJ3.1 U2.6 U2.16 U3.GND1 U4.1 U4.3 U4.6 U4.PAD U$1.2 U$3.1 U$3.5 U$3.9 U$3.11 U$3.13 U$3.15
GND1: C5.1 C10.1 C11.2 C12.2 C13.2 C14.2 C16.2 E2.1 E2.5 E2.9 E2.11 E2.13 E2.15 JP2.GND1 JP2.SHIELD1 JP2.SHIELD2 JP2.SHIELD3 R25.1 R27.1 R29.1 S2.2 SJ6.1 U1.6 U1.16 U5.GND1 U6.1 U6.3 U6.6 U6.PAD U$2.1 U$2.5 U$2.9 U$2.11 U$2.13 U$2.15 U$4.2
GND2: C17.1 C18.1 C19.2 C20.2 C21.2 C22.2 C24.2 E3.1 E3.5 E3.9 E3.11 E3.13 E3.15 JP3.GND1 JP3.SHIELD1 JP3.SHIELD2 JP3.SHIELD3 R40.1 R42.1 R44.1 S3.2 SJ9.1 U7.6 U7.16 U8.GND1 U9.1 U9.3 U9.6 U9.PAD U$5.1 U$5.5 U$5.9 U$5.11 U$5.13 U$5.15 U$6.2
GND3: C25.1 C26.1 C27.2 C28.2 C29.2 C30.2 C32.2 E4.1 E4.5 E4.9 E4.11 E4.13 E4.15 JP4.GND1 JP4.SHIELD1 JP4.SHIELD2 JP4.SHIELD3 R55.1 R57.1 R59.1 S4.2 SJ12.1 U10.6 U10.16 U11.GND1 U12.1 U12.3 U12.6 U12.PAD U$7.1 U$7.5 U$7.9 U$7.11 U$7.13 U$7.15 U$8.2
GND4: C33.1 C34.1 C35.2 C36.2 C37.2 C38.2 C40.2 E5.1 E5.5 E5.9 E5.11 E5.13 E5.15 JP5.GND1 JP5.SHIELD1 JP5.SHIELD2 JP5.SHIELD3 R70.1 R72.1 R74.1 S5.2 SJ15.1 U13.6 U13.16 U14.GND1 U15.1 U15.3 U15.6 U15.PAD U$9.1 U$9.5 U$9.9 U$9.11 U$9.13 U$9.15 U$10.2
GND5: C41.1 C42.1 C43.2 C44.2 C45.2 C46.2 C48.2 E6.1 E6.5 E6.9 E6.11 E6.13 E6.15 JP6.GND1 JP6.SHIELD1 JP6.SHIELD2 JP6.SHIELD3 R85.1 R87.1 R89.1 S6.2 SJ18.1 U16.6 U16.16 U17.GND1 U18.1 U18.3 U18.6 U18.PAD U$11.1 U$11.5 U$11.9 U$11.11 U$11.13 U$11.15 U$12.2
GND6: C49.1 C50.1 C51.2 C52.2 C53.2 C54.2 C56.2 E7.1 E7.5 E7.9 E7.11 E7.13 E7.15 JP7.GND1 JP7.SHIELD1 JP7.SHIELD2 JP7.SHIELD3 R100.1 R102.1 R104.1 S7.2 SJ21.1 U19.6 U19.16 U20.GND1 U21.1 U21.3 U21.6 U21.PAD U$13.1 U$13.5 U$13.9 U$13.11 U$13.13 U$13.15 U$14.2
GND7: C57.1 C58.1 C59.2 C60.2 C61.2 C62.2 C64.2 E8.1 E8.5 E8.9 E8.11 E8.13 E8.15 JP8.GND1 JP8.SHIELD1 JP8.SHIELD2 JP8.SHIELD3 R115.1 R117.1 R119.1 S8.2 SJ24.1 U22.6 U22.16 U23.GND1 U24.1 U24.3 U24.6 U24.PAD U$15.1 U$15.5 U$15.9 U$15.11 U$15.13 U$15.15 U$16.2
GP1: E2.48 U$2.48
GP2: E2.42 U$2.42
GP3: E2.34 U$2.34
GP4: E2.32 U$2.32
GP5: E2.30 U$2.30
GP6: E2.28 U$2.28
GP7: E2.26 U$2.26
GP8: E2.25 U$2.25
GP9: E2.24 U$2.24
GP10: E3.48 U$5.48
GP11: E3.42 U$5.42
GP12: E3.34 U$5.34
GP12_PWM0: E1.35 U$3.35
GP12_PWM1: E2.35 U$2.35
GP12_PWM2: E3.35 U$5.35
GP12_PWM3: E4.35 U$7.35
GP12_PWM4: E5.35 U$9.35
GP12_PWM5: E6.35 U$11.35
GP12_PWM6: E7.35 U$13.35
GP12_PWM7: E8.35 U$15.35
GP13: E3.32 U$5.32
GP13_PWM1: E1.33 U$3.33
GP13_PWM2: E2.33 U$2.33
GP13_PWM3: E3.33 U$5.33
GP13_PWM4: E4.33 U$7.33
GP13_PWM5: E5.33 U$9.33
GP13_PWM6: E6.33 U$11.33
GP13_PWM7: E7.33 U$13.33
GP13_PWM8: E8.33 U$15.33
GP14: E1.48 U$3.48
GP15: E1.42 U$3.42
GP16: E3.30 U$5.30
GP17: E3.28 U$5.28
GP18: E3.26 U$5.26
GP19: E3.25 U$5.25
GP19_I2C_1_SCL: E1.41 U$3.41
GP19_I2C_1_SCL1: E2.41 U$2.41
GP19_I2C_1_SCL2: E3.41 U$5.41
GP19_I2C_1_SCL3: E4.41 U$7.41
GP19_I2C_1_SCL4: E5.41 U$9.41
GP19_I2C_1_SCL5: E6.41 U$11.41
GP19_I2C_1_SCL6: E7.41 U$13.41
GP19_I2C_1_SCL7: E8.41 U$15.41
GP20: E3.24 U$5.24
GP20_I2C_1_SDA: E1.43 U$3.43
GP20_I2C_1_SDA1: E2.43 U$2.43
GP20_I2C_1_SDA2: E3.43 U$5.43
GP20_I2C_1_SDA3: E4.43 U$7.43
GP20_I2C_1_SDA4: E5.43 U$9.43
GP20_I2C_1_SDA5: E6.43 U$11.43
GP20_I2C_1_SDA6: E7.43 U$13.43
GP20_I2C_1_SDA7: E8.43 U$15.43
GP21: E4.48 U$7.48
GP22: E4.42 U$7.42
GP23: E4.34 U$7.34
GP24: E4.32 U$7.32
GP25: E4.30 U$7.30
GP26: E4.28 U$7.28
GP27: E4.26 U$7.26
GP27_I2C_6_SCL: E1.45 U$3.45
GP27_I2C_6_SCL1: E2.45 U$2.45
GP27_I2C_6_SCL2: E3.45 U$5.45
GP27_I2C_6_SCL3: E4.45 U$7.45
GP27_I2C_6_SCL4: E5.45 U$9.45
GP27_I2C_6_SCL5: E6.45 U$11.45
GP27_I2C_6_SCL6: E7.45 U$13.45
GP27_I2C_6_SCL7: E8.45 U$15.45
GP28: E4.25 U$7.25
GP28_I2C_6_SDA: E1.47 U$3.47
GP28_I2C_6_SDA1: E2.47 U$2.47
GP28_I2C_6_SDA2: E3.47 U$5.47
GP28_I2C_6_SDA3: E4.47 U$7.47
GP28_I2C_6_SDA4: E5.47 U$9.47
GP28_I2C_6_SDA5: E6.47 U$11.47
GP28_I2C_6_SDA6: E7.47 U$13.47
GP28_I2C_6_SDA7: E8.47 U$15.47
GP29: E4.24 U$7.24
GP30: E5.48 U$9.48
GP31: E5.42 U$9.42
GP32: E5.34 U$9.34
GP33: E5.32 U$9.32
GP34: E5.30 U$9.30
GP35: E5.28 U$9.28
GP36: E5.26 U$9.26
GP37: E5.25 U$9.25
GP38: E5.24 U$9.24
GP39: E6.48 U$11.48
GP40: E6.42 U$11.42
GP40_I2S_2_CLK: E1.52 U$3.52
GP40_I2S_2_CLK1: E2.52 U$2.52
GP40_I2S_2_CLK2: E3.52 U$5.52
GP40_I2S_2_CLK3: E4.52 U$7.52
GP40_I2S_2_CLK4: E5.52 U$9.52
GP40_I2S_2_CLK5: E6.52 U$11.52
GP40_I2S_2_CLK6: E7.52 U$13.52
GP40_I2S_2_CLK7: E8.52 U$15.52
GP41: E6.34 U$11.34
GP41_I2S_2_FS: E1.54 U$3.54
GP41_I2S_2_FS1: E2.54 U$2.54
GP41_I2S_2_FS2: E3.54 U$5.54
GP41_I2S_2_FS3: E4.54 U$7.54
GP41_I2S_2_FS4: E5.54 U$9.54
GP41_I2S_2_FS5: E6.54 U$11.54
GP41_I2S_2_FS6: E7.54 U$13.54
GP41_I2S_2_FS7: E8.54 U$15.54
GP42: E6.32 U$11.32
GP42_I2S_2_RXD: E1.50 U$3.50
GP42_I2S_2_RXD1: E2.50 U$2.50
GP42_I2S_2_RXD2: E3.50 U$5.50
GP42_I2S_2_RXD3: E4.50 U$7.50
GP42_I2S_2_RXD4: E5.50 U$9.50
GP42_I2S_2_RXD5: E6.50 U$11.50
GP42_I2S_2_RXD6: E7.50 U$13.50
GP42_I2S_2_RXD7: E8.50 U$15.50
GP43: E6.30 U$11.30
GP43_I2S_2_TXD: E1.56 U$3.56
GP43_I2S_2_TXD1: E2.56 U$2.56
GP43_I2S_2_TXD2: E3.56 U$5.56
GP43_I2S_2_TXD3: E4.56 U$7.56
GP43_I2S_2_TXD4: E5.56 U$9.56
GP43_I2S_2_TXD5: E6.56 U$11.56
GP43_I2S_2_TXD6: E7.56 U$13.56
GP43_I2S_2_TXD7: E8.56 U$15.56
GP44: E1.24 U$3.24
GP45: E1.26 U$3.26
GP46: E1.28 U$3.28
GP47: E1.30 U$3.30
GP48: E1.32 U$3.32
GP49: E1.34 U$3.34
GP50: E6.28 U$11.28
GP51: E6.26 U$11.26
GP52: E6.25 U$11.25
GP53: E6.24 U$11.24
GP54: E7.48 U$13.48
GP55: E7.42 U$13.42
GP56: E7.34 U$13.34
GP57: E7.32 U$13.32
GP58: E7.30 U$13.30
GP59: E7.28 U$13.28
GP60: E7.26 U$13.26
GP61: E7.25 U$13.25
GP62: E7.24 U$13.24
GP63: E8.48 U$15.48
GP64: E8.42 U$15.42
GP65: E8.34 U$15.34
GP66: E8.32 U$15.32
GP67: E8.30 U$15.30
GP68: E8.28 U$15.28
GP69: E8.26 U$15.26
GP70: E8.25 U$15.25
GP71: E8.24 U$15.24
GP77_SD_0_CD#: E1.60 U$3.60
GP77_SD_0_CD#1: E2.60 U$2.60
GP77_SD_0_CD#2: E3.60 U$5.60
GP77_SD_0_CD#3: E4.60 U$7.60
GP77_SD_0_CD#4: E5.60 U$9.60
GP77_SD_0_CD#5: E6.60 U$11.60
GP77_SD_0_CD#6: E7.60 U$13.60
GP77_SD_0_CD#7: E8.60 U$15.60
GP78_SD_0_CLK: E1.58 U$3.58
GP78_SD_0_CLK1: E2.58 U$2.58
GP78_SD_0_CLK2: E3.58 U$5.58
GP78_SD_0_CLK3: E4.58 U$7.58
GP78_SD_0_CLK4: E5.58 U$9.58
GP78_SD_0_CLK5: E6.58 U$11.58
GP78_SD_0_CLK6: E7.58 U$13.58
GP78_SD_0_CLK7: E8.58 U$15.58
GP79_SD_0_CMD: E1.62 U$3.62
GP79_SD_0_CMD1: E2.62 U$2.62
GP79_SD_0_CMD2: E3.62 U$5.62
GP79_SD_0_CMD3: E4.62 U$7.62
GP79_SD_0_CMD4: E5.62 U$9.62
GP79_SD_0_CMD5: E6.62 U$11.62
GP79_SD_0_CMD6: E7.62 U$13.62
GP79_SD_0_CMD7: E8.62 U$15.62
GP80_SD_0_DAT0: E1.66 U$3.66
GP80_SD_0_DAT1: E2.66 U$2.66
GP80_SD_0_DAT2: E3.66 U$5.66
GP80_SD_0_DAT3: E4.66 U$7.66
GP80_SD_0_DAT4: E5.66 U$9.66
GP80_SD_0_DAT5: E6.66 U$11.66
GP80_SD_0_DAT6: E7.66 U$13.66
GP80_SD_0_DAT7: E8.66 U$15.66
GP81_SD_0_DAT1: E1.70 U$3.70
GP81_SD_0_DAT2: E2.70 U$2.70
GP81_SD_0_DAT3: E3.70 U$5.70
GP81_SD_0_DAT4: E4.70 U$7.70
GP81_SD_0_DAT5: E5.70 U$9.70
GP81_SD_0_DAT6: E6.70 U$11.70
GP81_SD_0_DAT7: E7.70 U$13.70
GP81_SD_0_DAT8: E8.70 U$15.70
GP82_SD_0_DAT1: E2.64 U$2.64
GP82_SD_0_DAT2: E1.64 U$3.64
GP82_SD_0_DAT3: E3.64 U$5.64
GP82_SD_0_DAT4: E4.64 U$7.64
GP82_SD_0_DAT5: E5.64 U$9.64
GP82_SD_0_DAT6: E6.64 U$11.64
GP82_SD_0_DAT7: E7.64 U$13.64
GP82_SD_0_DAT8: E8.64 U$15.64
GP83_SD_0_DAT1: E2.68 U$2.68
GP83_SD_0_DAT2: E3.68 U$5.68
GP83_SD_0_DAT3: E1.68 U$3.68
GP83_SD_0_DAT4: E4.68 U$7.68
GP83_SD_0_DAT5: E5.68 U$9.68
GP83_SD_0_DAT6: E6.68 U$11.68
GP83_SD_0_DAT7: E7.68 U$13.68
GP83_SD_0_DAT8: E8.68 U$15.68
GP84_SD_CLK_FB: E1.44 U$3.44
GP84_SD_CLK_FB1: E2.44 U$2.44
GP84_SD_CLK_FB2: E3.44 U$5.44
GP84_SD_CLK_FB3: E4.44 U$7.44
GP84_SD_CLK_FB4: E5.44 U$9.44
GP84_SD_CLK_FB5: E6.44 U$11.44
GP84_SD_CLK_FB6: E7.44 U$13.44
GP84_SD_CLK_FB7: E8.44 U$15.44
GP109_SPI_2_CLK: E1.55 U$3.55
GP109_SPI_2_CLK1: E2.55 U$2.55
GP109_SPI_2_CLK2: E3.55 U$5.55
GP109_SPI_2_CLK3: E4.55 U$7.55
GP109_SPI_2_CLK4: E5.55 U$9.55
GP109_SPI_2_CLK5: E6.55 U$11.55
GP109_SPI_2_CLK6: E7.55 U$13.55
GP109_SPI_2_CLK7: E8.55 U$15.55
GP110_SPI_2_FS0: E1.53 U$3.53
GP110_SPI_2_FS1: E2.53 U$2.53
GP110_SPI_2_FS2: E3.53 U$5.53
GP110_SPI_2_FS3: E4.53 U$7.53
GP110_SPI_2_FS4: E5.53 U$9.53
GP110_SPI_2_FS5: E6.53 U$11.53
GP110_SPI_2_FS6: E7.53 U$13.53
GP110_SPI_2_FS7: E8.53 U$15.53
GP111_SPI_2_FS1: E1.51 U$3.51
GP111_SPI_2_FS2: E2.51 U$2.51
GP111_SPI_2_FS3: E3.51 U$5.51
GP111_SPI_2_FS4: E4.51 U$7.51
GP111_SPI_2_FS5: E5.51 U$9.51
GP111_SPI_2_FS6: E6.51 U$11.51
GP111_SPI_2_FS7: E7.51 U$13.51
GP111_SPI_2_FS8: E8.51 U$15.51
GP114_SPI_2_RXD: E1.59 U$3.59
GP114_SPI_2_RXD1: E2.59 U$2.59
GP114_SPI_2_RXD2: E3.59 U$5.59
GP114_SPI_2_RXD3: E4.59 U$7.59
GP114_SPI_2_RXD4: E5.59 U$9.59
GP114_SPI_2_RXD5: E6.59 U$11.59
GP114_SPI_2_RXD6: E7.59 U$13.59
GP114_SPI_2_RXD7: E8.59 U$15.59
GP115_SPI_2_TXD: E1.57 U$3.57
GP115_SPI_2_TXD1: E2.57 U$2.57
GP115_SPI_2_TXD2: E3.57 U$5.57
GP115_SPI_2_TXD3: E4.57 U$7.57
GP115_SPI_2_TXD4: E5.57 U$9.57
GP115_SPI_2_TXD5: E6.57 U$11.57
GP115_SPI_2_TXD6: E7.57 U$13.57
GP115_SPI_2_TXD7: E8.57 U$15.57
GP128_UART_1_CTS: E1.65 U$3.65
GP128_UART_1_CTS1: E2.65 U$2.65
GP128_UART_1_CTS2: E3.65 U$5.65
GP128_UART_1_CTS3: E4.65 U$7.65
GP128_UART_1_CTS4: E5.65 U$9.65
GP128_UART_1_CTS5: E6.65 U$11.65
GP128_UART_1_CTS6: E7.65 U$13.65
GP128_UART_1_CTS7: E8.65 U$15.65
GP129_UART_1_RTS: E1.63 U$3.63
GP129_UART_1_RTS1: E2.63 U$2.63
GP129_UART_1_RTS2: E3.63 U$5.63
GP129_UART_1_RTS3: E4.63 U$7.63
GP129_UART_1_RTS4: E5.63 U$9.63
GP129_UART_1_RTS5: E6.63 U$11.63
GP129_UART_1_RTS6: E7.63 U$13.63
GP129_UART_1_RTS7: E8.63 U$15.63
GP130_UART_1_RX: E1.61 U$3.61
GP130_UART_1_RX1: E2.61 U$2.61
GP130_UART_1_RX2: E3.61 U$5.61
GP130_UART_1_RX3: E4.61 U$7.61
GP130_UART_1_RX4: E5.61 U$9.61
GP130_UART_1_RX5: E6.61 U$11.61
GP130_UART_1_RX6: E7.61 U$13.61
GP130_UART_1_RX7: E8.61 U$15.61
GP131_UART_1_TX: E1.46 U$3.46
GP131_UART_1_TX1: E2.46 U$2.46
GP131_UART_1_TX2: E3.46 U$5.46
GP131_UART_1_TX3: E4.46 U$7.46
GP131_UART_1_TX4: E5.46 U$9.46
GP131_UART_1_TX5: E6.46 U$11.46
GP131_UART_1_TX6: E7.46 U$13.46
GP131_UART_1_TX7: E8.46 U$15.46
GP134_UART_2_RX: E1.22 R6.2 U$3.22
GP134_UART_2_RX1: E2.22 R21.2 U$2.22
GP134_UART_2_RX2: E3.22 R36.2 U$5.22
GP134_UART_2_RX3: E4.22 R51.2 U$7.22
GP134_UART_2_RX4: E5.22 R66.2 U$9.22
GP134_UART_2_RX5: E6.22 R81.2 U$11.22
GP134_UART_2_RX6: E7.22 R96.2 U$13.22
GP134_UART_2_RX7: E8.22 R111.2 U$15.22
GP135_UART_2_TX: E1.27 R7.2 U$3.27
GP135_UART_2_TX1: E2.27 R22.2 U$2.27
GP135_UART_2_TX2: E3.27 R37.2 U$5.27
GP135_UART_2_TX3: E4.27 R52.2 U$7.27
GP135_UART_2_TX4: E5.27 R67.2 U$9.27
GP135_UART_2_TX5: E6.27 R82.2 U$11.27
GP135_UART_2_TX6: E7.27 R97.2 U$13.27
GP135_UART_2_TX7: E8.27 R112.2 U$15.27
GP165: E1.25 U$3.25
GP182_PWM1: E2.37 U$2.37
GP182_PWM2: E1.37 U$3.37
GP182_PWM3: E3.37 U$5.37
GP182_PWM4: E4.37 U$7.37
GP182_PWM5: E5.37 U$9.37
GP182_PWM6: E6.37 U$11.37
GP182_PWM7: E7.37 U$13.37
GP182_PWM8: E8.37 U$15.37
GP183_PWM1: E2.39 U$2.39
GP183_PWM2: E3.39 U$5.39
GP183_PWM3: E1.39 U$3.39
GP183_PWM4: E4.39 U$7.39
GP183_PWM5: E5.39 U$9.39
GP183_PWM6: E6.39 U$11.39
GP183_PWM7: E7.39 U$13.39
GP183_PWM8: E8.39 U$15.39
MSIC_SLP_CLK: E1.7 U$3.7
MSIC_SLP_CLK1: E2.7 U$2.7
MSIC_SLP_CLK2: E3.7 U$5.7
MSIC_SLP_CLK3: E4.7 U$7.7
MSIC_SLP_CLK4: E5.7 U$9.7
MSIC_SLP_CLK5: E6.7 U$11.7
MSIC_SLP_CLK6: E7.7 U$13.7
MSIC_SLP_CLK7: E8.7 U$15.7
N$1: SJ1.1 U2.17
N$2: C3.1 JP1.D-1 R1.1
N$3: C4.1 JP1.D+1 R2.1
N$4: R1.2 U2.12
N$5: R2.2 U2.11
N$6: SJ2.1 U2.10
N$7: R3.1 SJ1.2
N$8: R4.1 SJ2.2
N$9: D1.C R3.2
N$10: D2.C R4.2
N$11: R6.1 U2.20
N$12: D3.C R5.2
N$13: R5.1 SJ3.2
N$14: R7.1 U2.4
N$15: R8.2 R9.2 S1.1
N$16: R10.2 U$1.5
N$17: C7.2 R13.1 R14.2 U4.4
N$18: Q1.1 R15.1
N$19: L1.P$1 U4.2
N$20: C11.1 JP2.D-1 R16.1
N$21: C12.1 JP2.D+1 R17.1
N$22: R16.2 U1.12
N$23: R17.2 U1.11
N$24: SJ4.1 U1.17
N$25: SJ5.1 U1.10
N$26: R18.1 SJ4.2
N$27: R19.1 SJ5.2
N$28: D5.C R18.2
N$29: D6.C R19.2
N$30: D7.C R20.2
N$31: R20.1 SJ6.2
N$32: R21.1 U1.20
N$33: R22.1 U1.4
N$34: R23.2 R24.2 S2.1
N$35: R25.2 U$4.5
N$36: C15.2 R28.1 R29.2 U6.4
N$37: L2.P$1 U6.2
N$38: Q2.1 R30.1
N$39: C19.1 JP3.D-1 R31.1
N$40: C20.1 JP3.D+1 R32.1
N$41: R31.2 U7.12
N$42: R32.2 U7.11
N$43: SJ7.1 U7.17
N$44: SJ8.1 U7.10
N$45: R33.1 SJ7.2
N$46: R34.1 SJ8.2
N$47: D9.C R33.2
N$48: D10.C R34.2
N$49: D11.C R35.2
N$50: R35.1 SJ9.2
N$51: R36.1 U7.20
N$52: R37.1 U7.4
N$53: R38.2 R39.2 S3.1
N$54: R40.2 U$6.5
N$55: C23.2 R43.1 R44.2 U9.4
N$56: L3.P$1 U9.2
N$57: Q3.1 R45.1
N$58: C27.1 JP4.D-1 R46.1
N$59: C28.1 JP4.D+1 R47.1
N$60: R46.2 U10.12
N$61: R47.2 U10.11
N$62: SJ10.1 U10.17
N$63: SJ11.1 U10.10
N$64: R48.1 SJ10.2
N$65: R49.1 SJ11.2
N$66: D13.C R48.2
N$67: D14.C R49.2
N$68: D15.C R50.2
N$69: R50.1 SJ12.2
N$70: R51.1 U10.20
N$71: R52.1 U10.4
N$72: R53.2 R54.2 S4.1
N$73: R55.2 U$8.5
N$74: C31.2 R58.1 R59.2 U12.4
N$75: L4.P$1 U12.2
N$76: Q4.1 R60.1
N$77: C35.1 JP5.D-1 R61.1
N$78: C36.1 JP5.D+1 R62.1
N$79: R61.2 U13.12
N$80: R62.2 U13.11
N$81: SJ13.1 U13.17
N$82: SJ14.1 U13.10
N$83: R63.1 SJ13.2
N$84: R64.1 SJ14.2
N$85: D17.C R63.2
N$86: D18.C R64.2
N$87: D19.C R65.2
N$88: R65.1 SJ15.2
N$89: R66.1 U13.20
N$90: R67.1 U13.4
N$91: R68.2 R69.2 S5.1
N$92: R70.2 U$10.5
N$93: C39.2 R73.1 R74.2 U15.4
N$94: L5.P$1 U15.2
N$95: Q5.1 R75.1
N$96: C43.1 JP6.D-1 R76.1
N$97: C44.1 JP6.D+1 R77.1
N$98: R76.2 U16.12
N$99: R77.2 U16.11
N$100: SJ16.1 U16.17
N$101: SJ17.1 U16.10
N$102: R78.1 SJ16.2
N$103: R79.1 SJ17.2
N$104: D21.C R78.2
N$105: D22.C R79.2
N$106: D23.C R80.2
N$107: R80.1 SJ18.2
N$108: R81.1 U16.20
N$109: R82.1 U16.4
N$110: R83.2 R84.2 S6.1
N$111: R85.2 U$12.5
N$112: C47.2 R88.1 R89.2 U18.4
N$113: L6.P$1 U18.2
N$114: Q6.1 R90.1
N$115: C51.1 JP7.D-1 R91.1
N$116: C52.1 JP7.D+1 R92.1
N$117: R91.2 U19.12
N$118: R92.2 U19.11
N$119: SJ19.1 U19.17
N$120: SJ20.1 U19.10
N$121: R93.1 SJ19.2
N$122: R94.1 SJ20.2
N$123: D25.C R93.2
N$124: D26.C R94.2
N$125: D27.C R95.2
N$126: R95.1 SJ21.2
N$127: R96.1 U19.20
N$128: R97.1 U19.4
N$129: R98.2 R99.2 S7.1
N$130: R100.2 U$14.5
N$131: C55.2 R103.1 R104.2 U21.4
N$132: L7.P$1 U21.2
N$133: Q7.1 R105.1
N$134: C59.1 JP8.D-1 R106.1
N$135: C60.1 JP8.D+1 R107.1
N$136: R106.2 U22.12
N$137: R107.2 U22.11
N$138: SJ22.1 U22.17
N$139: SJ23.1 U22.10
N$140: R108.1 SJ22.2
N$141: R109.1 SJ23.2
N$142: D29.C R108.2
N$143: D30.C R109.2
N$144: D31.C R110.2
N$145: R110.1 SJ24.2
N$146: R111.1 U22.20
N$147: R112.1 U22.4
N$148: R113.2 R114.2 S8.1
N$149: R115.2 U$16.5
N$150: C63.2 R118.1 R119.2 U24.4
N$151: L8.P$1 U24.2
N$152: Q8.1 R120.1
OSC_CLK_OUT: E1.67 U$3.67
OSC_CLK_OUT1: E2.67 U$2.67
OSC_CLK_OUT2: E3.67 U$5.67
OSC_CLK_OUT3: E4.67 U$7.67
OSC_CLK_OUT4: E5.67 U$9.67
OSC_CLK_OUT5: E6.67 U$11.67
OSC_CLK_OUT6: E7.67 U$13.67
OSC_CLK_OUT7: E8.67 U$15.67
PSW: E1.21 R12.2 U$1.3 U$3.21
PSW1: E2.21 R27.2 U$2.21 U$4.3
PSW2: E3.21 R42.2 U$5.21 U$6.3
PSW3: E4.21 R57.2 U$7.21 U$8.3
PSW4: E5.21 R72.2 U$9.21 U$10.3
PSW5: E6.21 R87.2 U$11.21 U$12.3
PSW6: E7.21 R102.2 U$13.21 U$14.3
PSW7: E8.21 R117.2 U$15.21 U$16.3
PWRBTN#: E1.17 R9.1 U$3.17
PWRBTN#1: E2.17 R24.1 U$2.17
PWRBTN#2: E3.17 R39.1 U$5.17
PWRBTN#3: E4.17 R54.1 U$7.17
PWRBTN#4: E5.17 R69.1 U$9.17
PWRBTN#5: E6.17 R84.1 U$11.17
PWRBTN#6: E7.17 R99.1 U$13.17
PWRBTN#7: E8.17 R114.1 U$15.17
RCVR_MODE: E1.31 U$3.31
RCVR_MODE1: E2.31 U$2.31
RCVR_MODE2: E3.31 U$5.31
RCVR_MODE3: E4.31 U$7.31
RCVR_MODE4: E5.31 U$9.31
RCVR_MODE5: E6.31 U$11.31
RCVR_MODE6: E7.31 U$13.31
RCVR_MODE7: E8.31 U$15.31
RESET_OUT#: E1.36 U$3.36
RESET_OUT#1: E2.36 U$2.36
RESET_OUT#2: E3.36 U$5.36
RESET_OUT#3: E4.36 U$7.36
RESET_OUT#4: E5.36 U$9.36
RESET_OUT#5: E6.36 U$11.36
RESET_OUT#6: E7.36 U$13.36
RESET_OUT#7: E8.36 U$15.36
USB_DN: E1.18 U3.D-1 U$3.18
USB_DN1: E2.18 U5.D-1 U$2.18
USB_DN2: E3.18 U8.D-1 U$5.18
USB_DN3: E4.18 U11.D-1 U$7.18
USB_DN4: E5.18 U14.D-1 U$9.18
USB_DN5: E6.18 U17.D-1 U$11.18
USB_DN6: E7.18 U20.D-1 U$13.18
USB_DN7: E8.18 U23.D-1 U$15.18
USB_DP: E1.16 U3.D+1 U$3.16
USB_DP1: E2.16 U5.D+1 U$2.16
USB_DP2: E3.16 U8.D+1 U$5.16
USB_DP3: E4.16 U11.D+1 U$7.16
USB_DP4: E5.16 U14.D+1 U$9.16
USB_DP5: E6.16 U17.D+1 U$11.16
USB_DP6: E7.16 U20.D+1 U$13.16
USB_DP7: E8.16 U23.D+1 U$15.16
USB_ID: E1.3 U3.ID1 U$3.3
USB_ID1: E2.3 U5.ID1 U$2.3
USB_ID2: E3.3 U8.ID1 U$5.3
USB_ID3: E4.3 U11.ID1 U$7.3
USB_ID4: E5.3 U14.ID1 U$9.3
USB_ID5: E6.3 U17.ID1 U$11.3
USB_ID6: E7.3 U20.ID1 U$13.3
USB_ID7: E8.3 U23.ID1 U$15.3
USB_VBUS: C8.1 D4.A E1.20 U3.VBUS1 U$1.6 U$3.20
USB_VBUS1: C14.1 D8.A E2.20 U5.VBUS1 U$2.20 U$4.6
USB_VBUS2: C22.1 D12.A E3.20 U8.VBUS1 U$5.20 U$6.6
USB_VBUS3: C30.1 D16.A E4.20 U11.VBUS1 U$7.20 U$8.6
USB_VBUS4: C38.1 D20.A E5.20 U14.VBUS1 U$9.20 U$10.6
USB_VBUS5: C46.1 D24.A E6.20 U17.VBUS1 U$11.20 U$12.6
USB_VBUS6: C54.1 D28.A E7.20 U20.VBUS1 U$13.20 U$14.6
USB_VBUS7: C62.1 D32.A E8.20 U23.VBUS1 U$15.20 U$16.6
V_BAT_BKUP: E1.23 U$3.23
V_BAT_BKUP1: E2.23 U$2.23
V_BAT_BKUP2: E3.23 U$5.23
V_BAT_BKUP3: E4.23 U$7.23
V_BAT_BKUP4: E5.23 U$9.23
V_BAT_BKUP5: E6.23 U$11.23
V_BAT_BKUP6: E7.23 U$13.23
V_BAT_BKUP7: E8.23 U$15.23
VSYS: C6.1 C7.1 D1.A D2.A D3.A E1.2 E1.4 E1.6 L1.P$2 Q1.3 R8.1 R13.2 U$3.2 U$3.4 U$3.6
VSYS1: C13.1 C15.1 D5.A D6.A D7.A E2.2 E2.4 E2.6 L2.P$2 Q2.3 R23.1 R28.2 U$2.2 U$2.4 U$2.6
VSYS2: C21.1 C23.1 D9.A D10.A D11.A E3.2 E3.4 E3.6 L3.P$2 Q3.3 R38.1 R43.2 U$5.2 U$5.4 U$5.6
VSYS3: C29.1 C31.1 D13.A D14.A D15.A E4.2 E4.4 E4.6 L4.P$2 Q4.3 R53.1 R58.2 U$7.2 U$7.4 U$7.6
VSYS4: C37.1 C39.1 D17.A D18.A D19.A E5.2 E5.4 E5.6 L5.P$2 Q5.3 R68.1 R73.2 U$9.2 U$9.4 U$9.6
VSYS5: C45.1 C47.1 D21.A D22.A D23.A E6.2 E6.4 E6.6 L6.P$2 Q6.3 R83.1 R88.2 U$11.2 U$11.4 U$11.6
VSYS6: C53.1 C55.1 D25.A D26.A D27.A E7.2 E7.4 E7.6 L7.P$2 Q7.3 R98.1 R103.2 U$13.2 U$13.4 U$13.6
VSYS7: C61.1 C63.1 D29.A D30.A D31.A E8.2 E8.4 E8.6 L8.P$2 Q8.3 R113.1 R118.2 U$15.2 U$15.4 U$15.6

## Tracks (layer width: path | path; a pad name or v marks a point on that pad's centre or on a via)
1.8V  (via drill 0.33, 0.51)
  Top 0.152: U$3.12 30.86,27.84 29.72,28.98 v29.72,29.46 29.72,29.49
  Top 0.254: R11.1 v22.99,35.89 22.99,34.76 C1.2 22.84,34.73 U2.3 19.88,34.73 17.34,37.27 U2.14
  Bottom 0.152: 29.72,29.49 v29.72,29.46 29.72,28.98 30.86,27.84 U$3.12 | U$3.12
  Bottom 0.254: 29.72,29.49 29.36,29.84 28.83,29.84 25.15,33.53 23.37,33.53 22.99,33.91 v22.99,35.89
1.8V1  (via drill 0.33, 0.51)
  Top 0.152: U$2.12 63.88,27.84 62.74,28.98 v62.74,29.46 62.74,29.49
  Top 0.254: R26.1 v56.01,35.89 56.01,34.76 C5.2 55.85,34.73 U1.3 52.9,34.73 50.35,37.27 U1.14
  Bottom 0.152: 62.74,29.49 v62.74,29.46 62.74,28.98 63.88,27.84 U$2.12 | U$2.12
  Bottom 0.254: 62.74,29.49 62.38,29.84 61.85,29.84 58.17,33.53 56.39,33.53 56.01,33.91 v56.01,35.89
1.8V2  (via drill 0.33, 0.51)
  Top 0.152: U$5.12 96.9,27.84 95.76,28.98 v95.76,29.46 95.76,29.49
  Top 0.254: R41.1 v89.03,35.89 89.03,34.76 C17.2 88.88,34.73 U7.3 85.92,34.73 83.38,37.27 U7.14
  Bottom 0.152: 95.76,29.49 v95.76,29.46 95.76,28.98 96.9,27.84 U$5.12 | U$5.12
  Bottom 0.254: 95.76,29.49 95.4,29.84 94.87,29.84 91.19,33.53 89.41,33.53 89.03,33.91 v89.03,35.89
1.8V3  (via drill 0.33, 0.51)
  Top 0.152: U$7.12 129.92,27.84 128.78,28.98 v128.78,29.46 128.78,29.49
  Top 0.254: R56.1 v122.05,35.89 122.05,34.76 C25.2 121.89,34.73 U10.3 118.94,34.73 116.39,37.27 U10.14
  Bottom 0.152: 128.78,29.49 v128.78,29.46 128.78,28.98 129.92,27.84 U$7.12 | U$7.12
  Bottom 0.254: 128.78,29.49 128.42,29.84 127.89,29.84 124.21,33.53 122.43,33.53 122.05,33.91 v122.05,35.89
1.8V4  (via drill 0.33, 0.51)
  Top 0.152: U$9.12 30.86,76.1 29.72,77.24 v29.72,77.72 29.72,77.75
  Top 0.254: R71.1 v22.99,84.15 22.99,83.02 C33.2 22.84,83 U13.3 19.88,83 17.34,85.53 U13.14
  Bottom 0.152: 29.72,77.75 v29.72,77.72 29.72,77.24 30.86,76.1 U$9.12 | U$9.12
  Bottom 0.254: 29.72,77.75 29.36,78.11 28.83,78.11 25.15,81.79 23.37,81.79 22.99,82.17 v22.99,84.15
1.8V5  (via drill 0.33, 0.51)
  Top 0.152: U$11.12 63.88,76.1 62.74,77.24 v62.74,77.72 62.74,77.75
  Top 0.254: R86.1 v56.01,84.15 56.01,83.02 C41.2 55.85,83 U16.3 52.9,83 50.35,85.53 U16.14
  Bottom 0.152: 62.74,77.75 v62.74,77.72 62.74,77.24 63.88,76.1 U$11.12 | U$11.12
  Bottom 0.254: 62.74,77.75 62.38,78.11 61.85,78.11 58.17,81.79 56.39,81.79 56.01,82.17 v56.01,84.15
1.8V6  (via drill 0.33, 0.51)
  Top 0.152: U$13.12 96.9,76.1 95.76,77.24 v95.76,77.72 95.76,77.75
  Top 0.254: R101.1 v89.03,84.15 89.03,83.02 C49.2 88.88,83 U19.3 85.92,83 83.38,85.53 U19.14
  Bottom 0.152: 95.76,77.75 v95.76,77.72 95.76,77.24 96.9,76.1 U$13.12 | U$13.12
  Bottom 0.254: 95.76,77.75 95.4,78.11 94.87,78.11 91.19,81.79 89.41,81.79 89.03,82.17 v89.03,84.15
1.8V7  (via drill 0.33, 0.51)
  Top 0.152: U$15.12 129.92,76.1 128.78,77.24 v128.78,77.72 128.78,77.75
  Top 0.254: R116.1 v122.05,84.15 122.05,83.02 C57.2 121.89,83 U22.3 118.94,83 116.39,85.53 U22.14
  Bottom 0.152: 128.78,77.75 v128.78,77.72 128.78,77.24 129.92,76.1 U$15.12 | U$15.12
  Bottom 0.254: 128.78,77.75 128.42,78.11 127.89,78.11 124.21,81.79 122.43,81.79 122.05,82.17 v122.05,84.15
3.3V  (via drill 0.33)
  other vias: 30.67,29
  pour Top: 32.77,28.14 31.01,28.14 30.3,28.85 30.3,29.13 30.53,29.36 30.81,29.36 31.04,29.13 31.04,28.85 31.24,28.65 32.77,28.65
  pour Bottom: 32.77,28.14 31.01,28.14 30.3,28.85 30.3,29.13 30.53,29.36 30.81,29.36 31.04,29.13 31.04,28.85 31.24,28.65 32.77,28.65
3.3V1  (via drill 0.33)
  other vias: 63.69,29